# Allegro board DAQ_CARD_2V0.brd
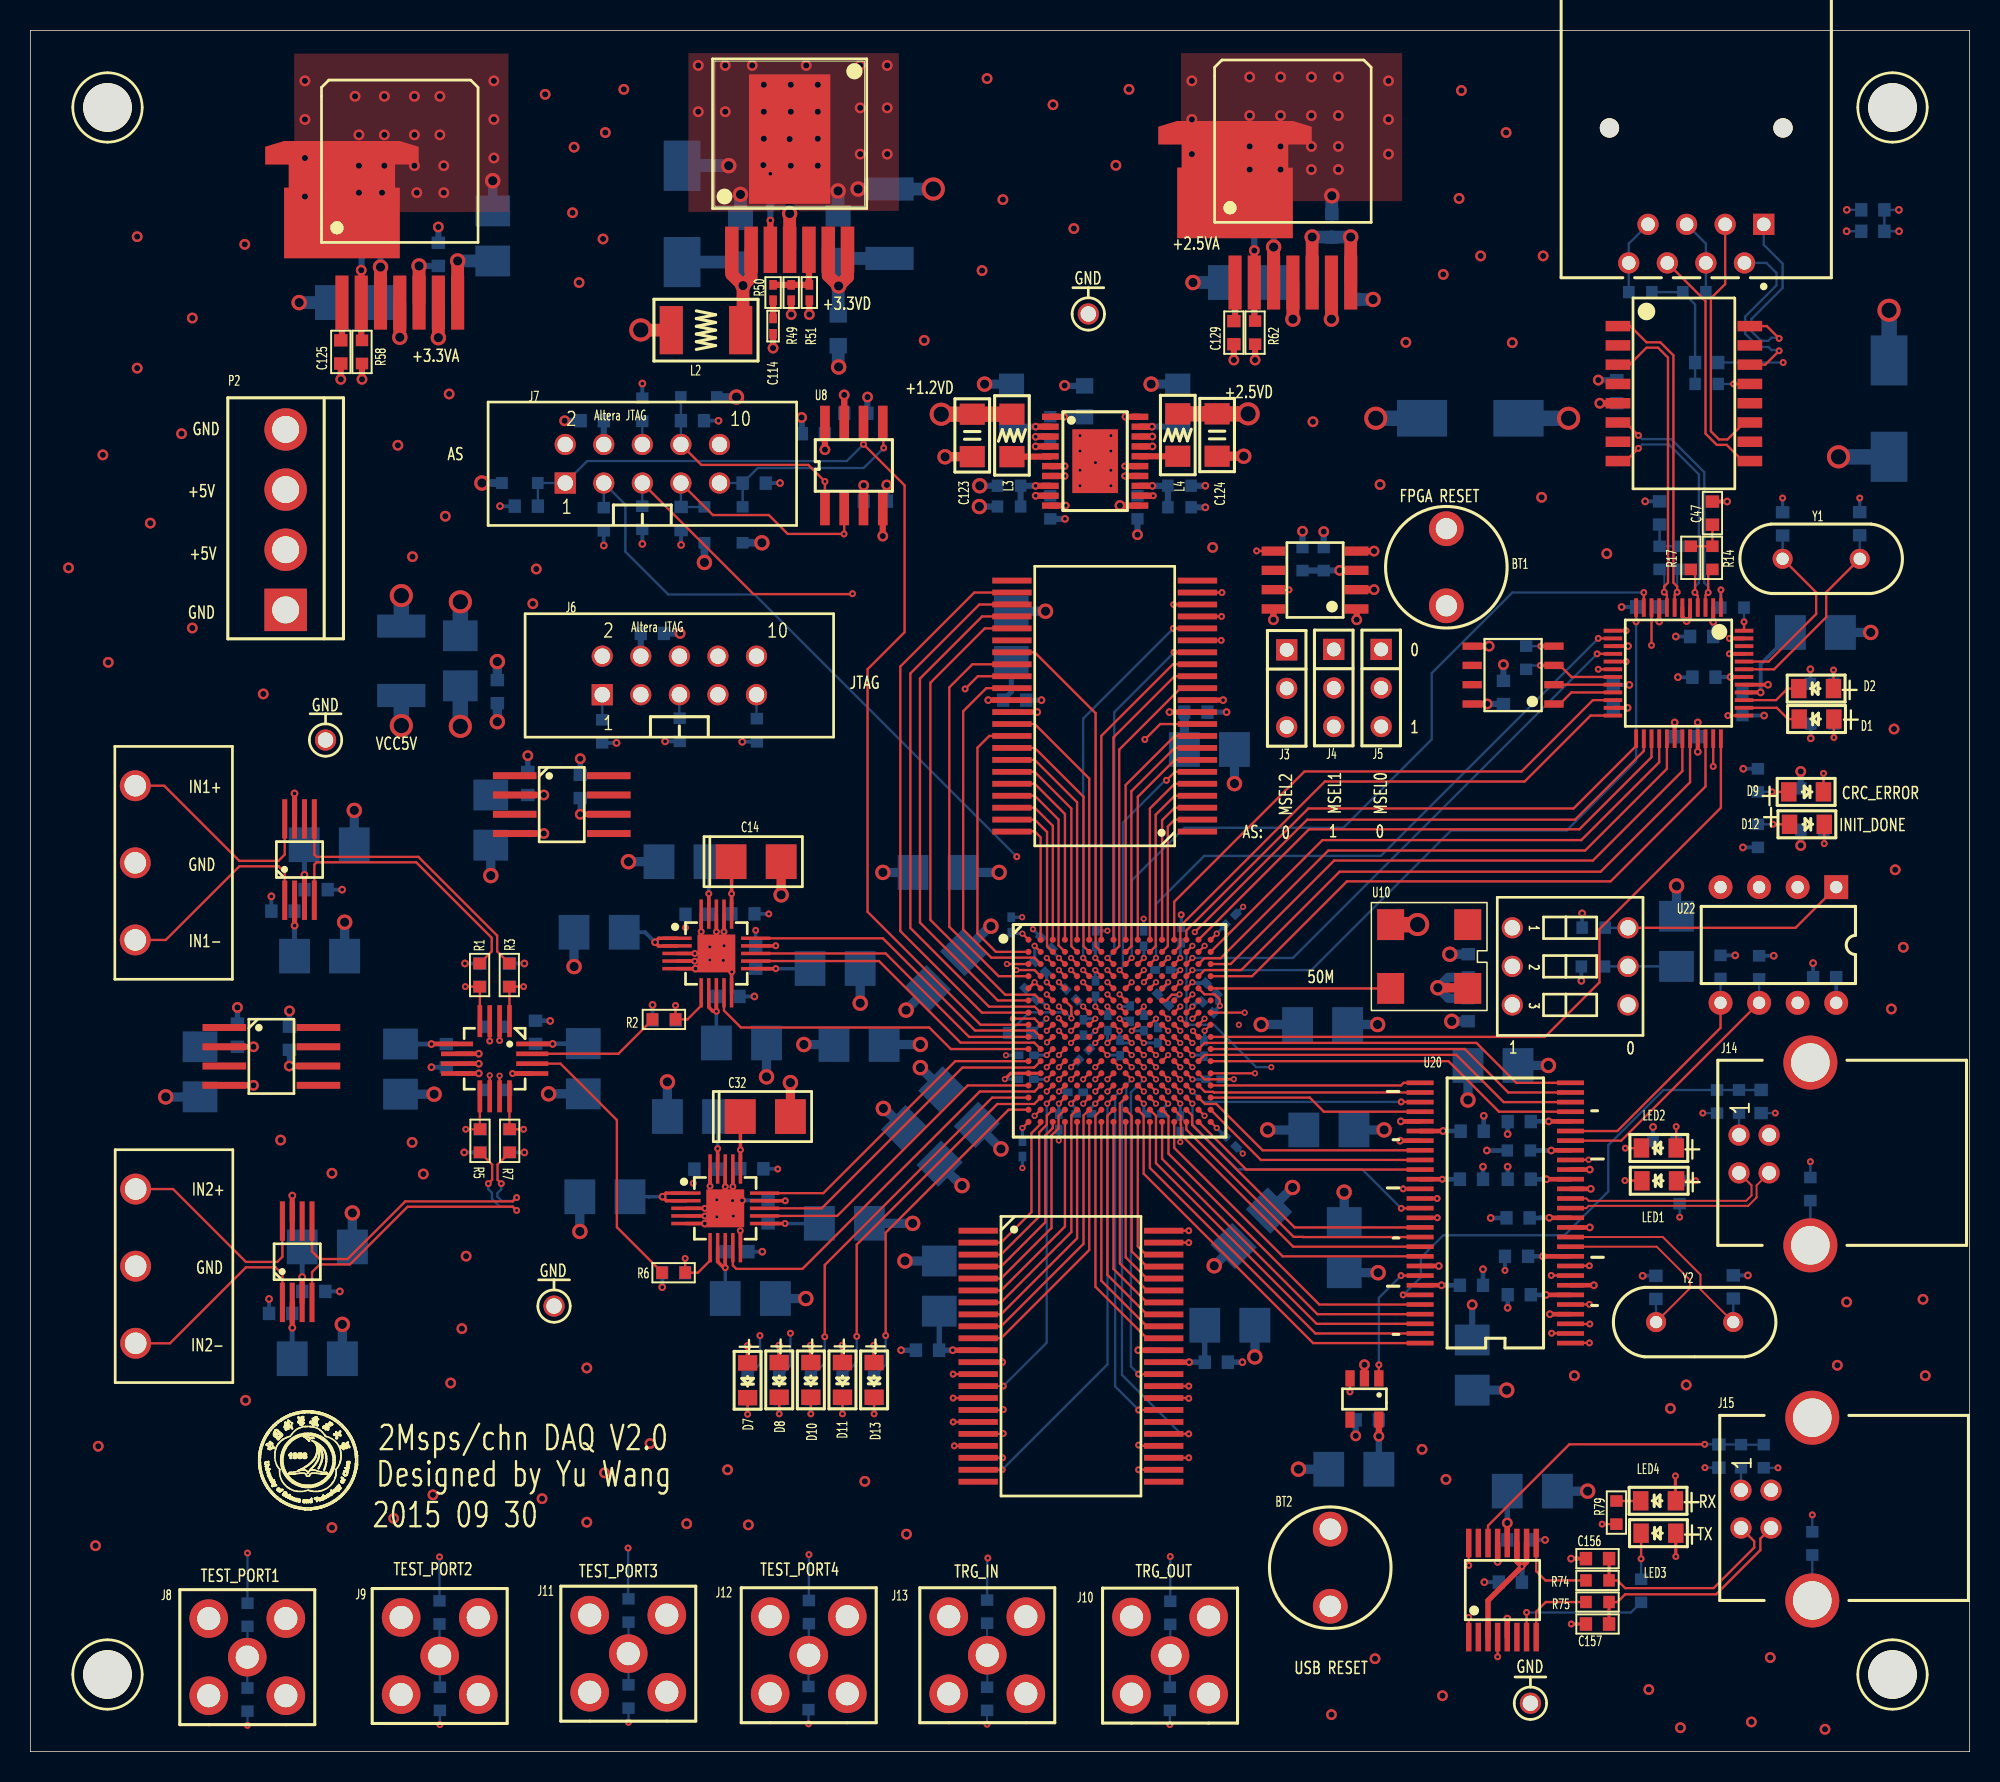
[diagram p0: board, top side]
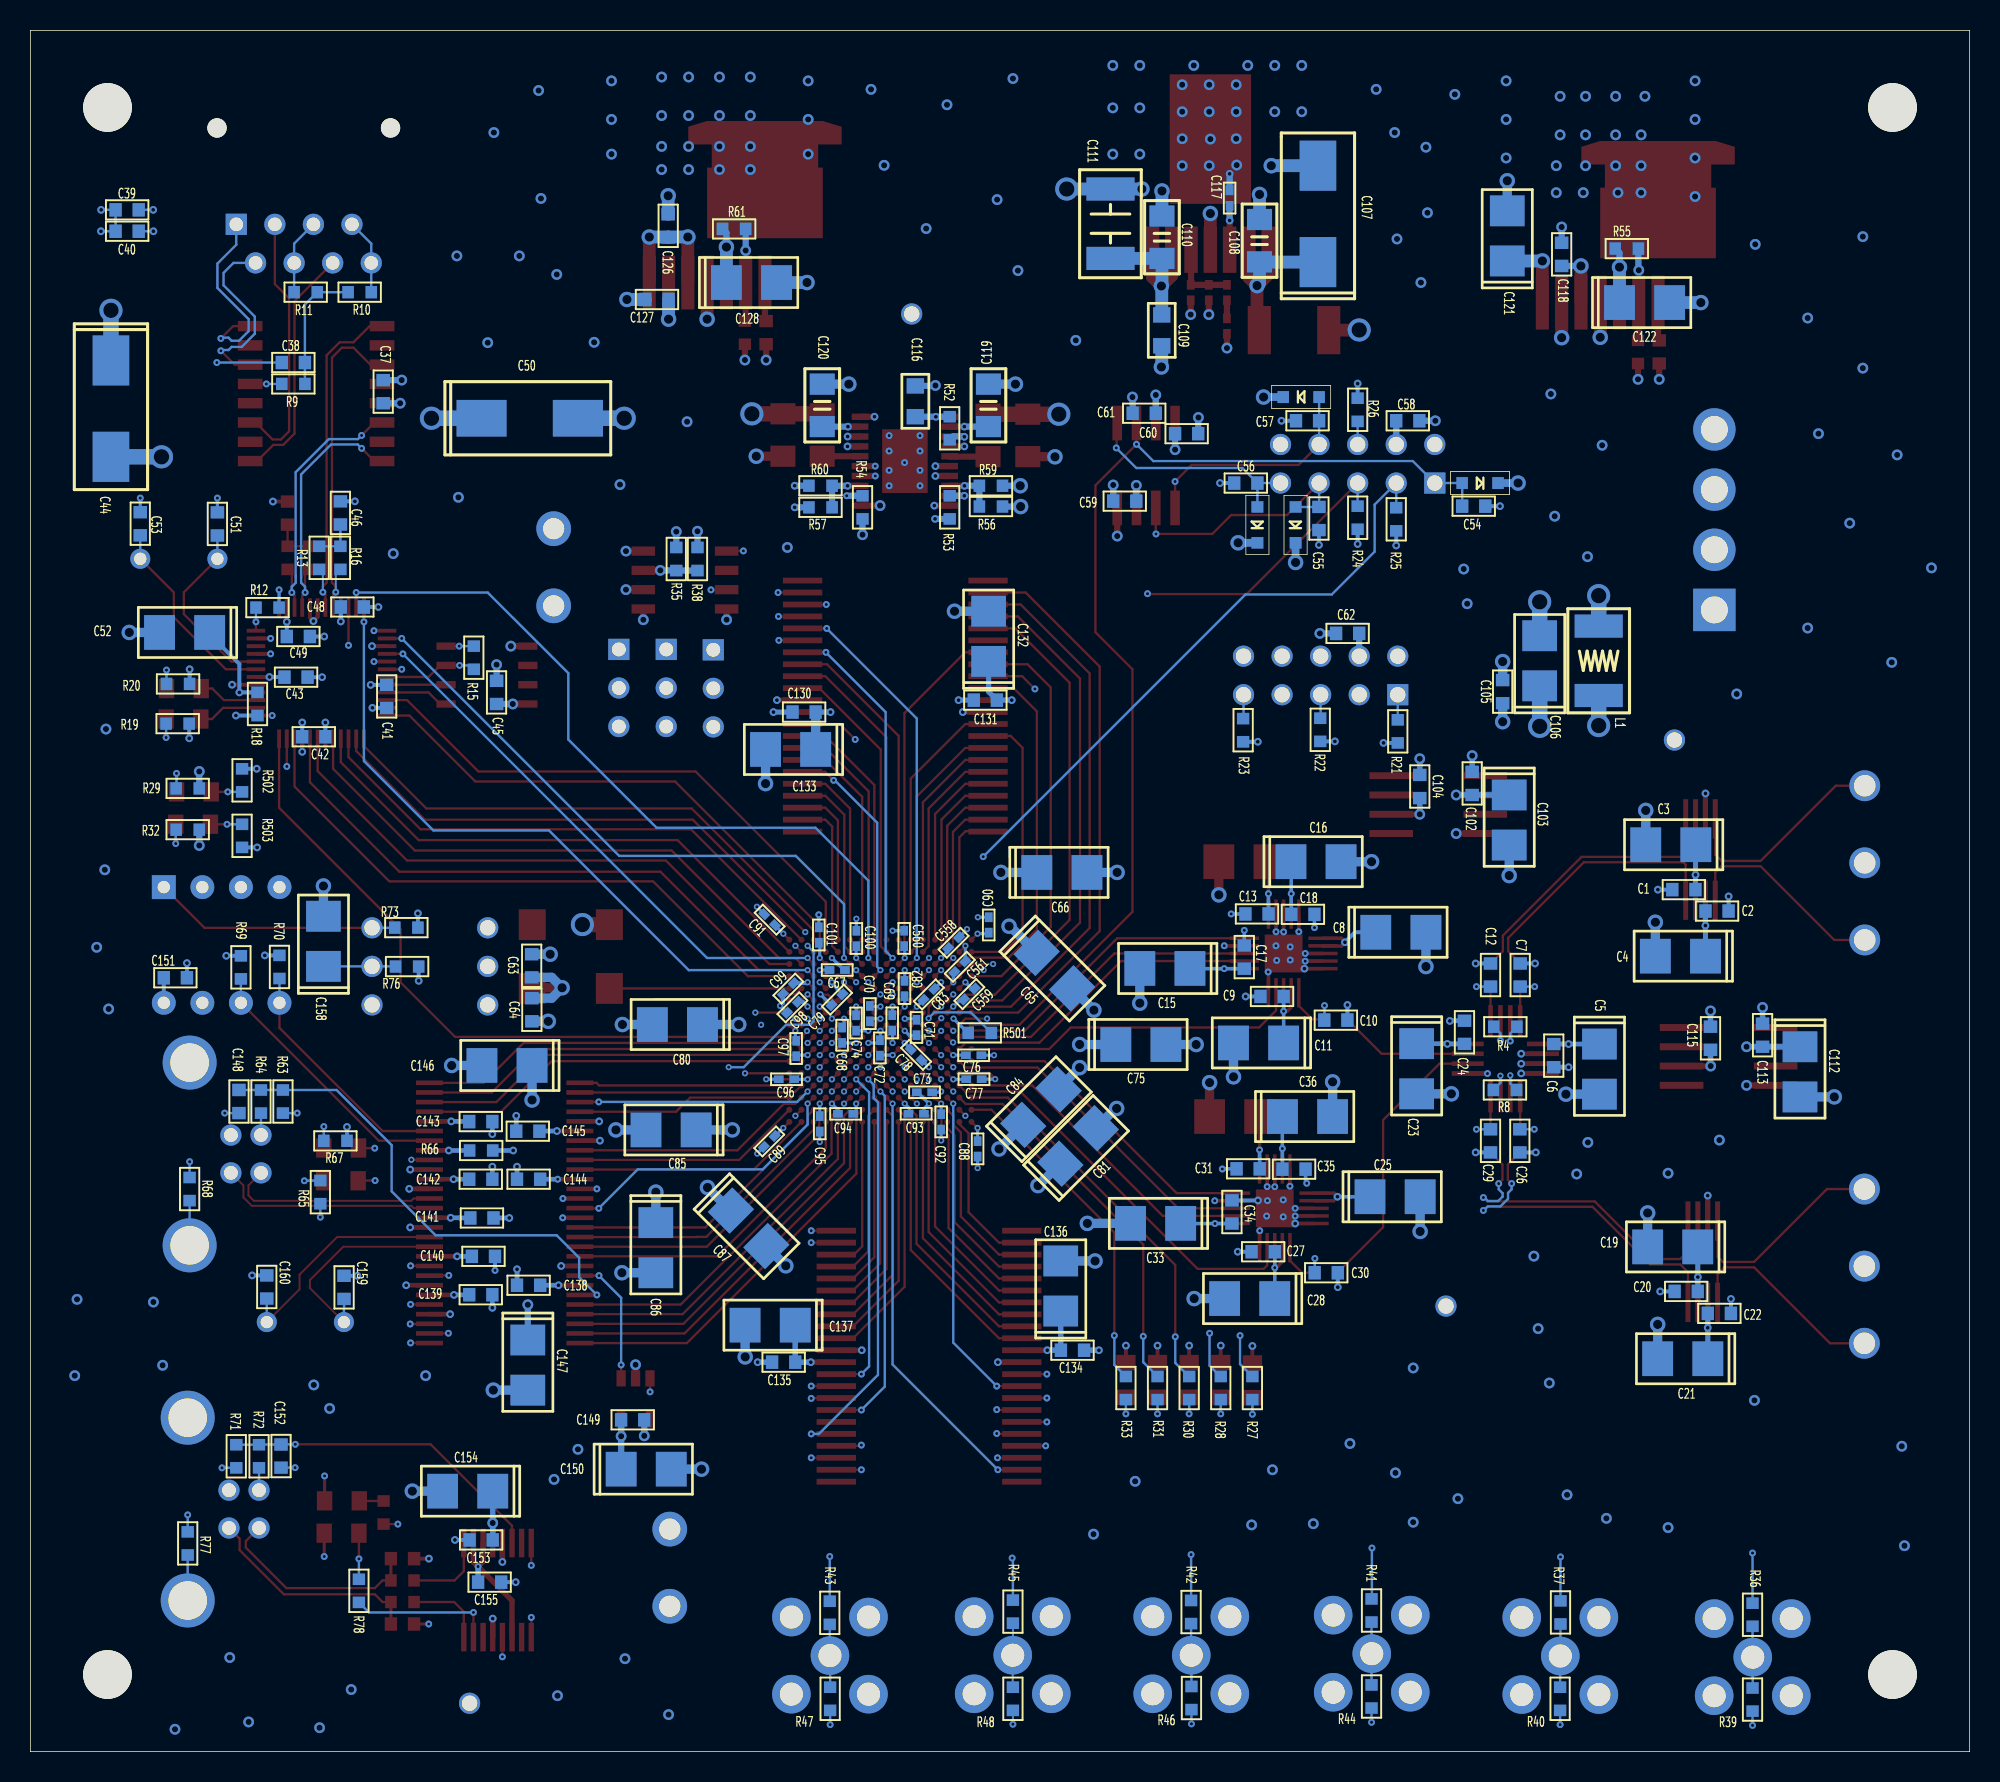
[diagram p1: board, bottom side, seen from below]

Outline 127.74 x 113.39 mm; copper layers: TOP, GND1, SIG1, POWER1, POWER2, SIG2, GND2, BOTTOM. Coordinates in mm from the lower left corner of the outline.
Outline path: 0,113.39 0,0 127.74,0 127.74,113.39 0,113.39

## Design rules (mm)
net group DIFF_SEC_IN1: nets N16777290 N16777300
net group DIFF_SEC_IN2: nets N16782189 N16782191
net group DIFFIN1: nets IN1+ IN1-
net group DIFFIN2: nets IN2+ IN2-
net group DIFFOUT1: nets N16778933 N16778934
net group DIFFOUT2: nets N16782312 N16782314
net group RX: nets RX+ RX-
net group RX2: nets N16772544 N16772560
net group TX: nets TX+ TX-
net group TX2: nets N16772564 N16772568
net group USB_DATA: nets N02792 N02796
net group USB_UART: nets N16767643 N16767647

## Placement (name value [footprint] x y rotation side)
BT1  Button  [INDC2-200-M]  93.27 78.02 90 top
BT2  Button  [INDC2-200-M]  85.62 12.12 270 top
C1  0.1uF  [SC0603]  18.82 56.78 0 bottom
C2  0.1uF  [SC0603]  16.64 55.37 180 bottom
C3  10uF  [STC3528]  19.68 59.74 0 bottom
C4  10uF  [STC3528]  19.05 52.4 0 bottom
C5  10uF  [STC3528]  24.38 44.96 270 bottom
C6  0.1uF  [SC0603]  27.39 45.85 270 bottom
C7  2.2n  [SC0603]  29.6 51.16 270 bottom
C8  10uF  [STC3528]  37.46 53.98 180 bottom
C9  0.1uF  [SC0603]  45.95 49.75 0 bottom
C10  0.1uF  [SC0603]  41.74 48.18 180 bottom
C11  10uF  [STC3528]  46.84 46.69 0 bottom
C12  2.2n  [SC0603]  31.56 51.16 90 bottom
C13  0.1uF  [SC0603]  46.94 55.18 0 bottom
C14  10uF  [STC3528]  47.8 58.62 0 top
C15  10uF  [STC3528]  53.01 51.59 0 bottom
C16  10uF  [STC3528]  43.05 58.62 180 bottom
C17  0.1uF  [SC0603]  47.78 52.34 90 bottom
C18  0.1uF  [SC0603]  43.92 55.16 180 bottom
C19  10uF  [STC3528]  19.56 33.25 0 bottom
C20  0.1uF  [SC0603]  18.67 30.31 0 bottom
C21  10uF  [STC3528]  18.9 25.88 0 bottom
C22  0.1uF  [SC0603]  16.48 28.87 180 bottom
C23  10uF  [STC3528]  36.42 44.98 270 bottom
C24  0.1uF  [SC0603]  33.27 47.38 90 bottom
C25  10uF  [STC3528]  37.85 36.55 180 bottom
C26  2.2n  [SC0603]  29.63 40.23 90 bottom
C27  0.1uF  [SC0603]  46.53 32.93 0 bottom
C28  10uF  [STC3528]  47.42 29.85 0 bottom
C29  2.2n  [SC0603]  31.56 40.23 270 bottom
C30  0.1uF  [SC0603]  42.38 31.55 180 bottom
C31  0.1uF  [SC0603]  47.52 38.39 0 bottom
C32  10uF  [STC3528]  48.41 41.83 0 top
C33  10uF  [STC3528]  53.62 34.8 0 bottom
C34  0.1uF  [SC0603]  48.59 35.55 90 bottom
C35  0.1uF  [SC0603]  44.5 38.37 180 bottom
C36  10uF  [STC3528]  43.61 41.83 180 bottom
C37  0.1uF  [SC0603]  104.5 89.59 90 bottom
C38  0.01uF 2KV  [SC0603]  110.41 91.5 0 bottom
C39  0.1uF  [SC0603]  121.36 101.56 180 bottom
C40  0.1uF  [SC0603]  121.36 100.15 180 bottom
C41  0.1uF  [SC0603]  104.27 69.51 90 bottom
C42  0.1uF  [SC0603]  109.07 66.85 0 bottom
C43  0.1uF  [SC0603]  110.24 70.78 180 bottom
C44  220uF  [STC7343]  122.43 88.47 270 bottom
C45  0.1uF  [SC0603]  97.03 69.77 90 bottom
C46  0.1uF  [SC0603]  107.31 81.6 90 bottom
C47  0.1uF  [SC0603]  110.79 81.58 90 top
C48  0.1uF  [SC0603]  106.53 75.4 180 bottom
C49  0.1uF  [SC0603]  110.08 73.46 180 bottom
C50  220uF  [STC7343]  94.84 87.83 180 bottom
C51  22pF  [SC0603]  115.42 80.87 90 bottom
C52  10uF  [STC3528]  117.58 73.72 0 bottom
C53  22pF  [SC0603]  120.5 80.89 90 bottom
C54  10pF  [SC0603]  32.66 82.04 180 bottom
C55  10pF  [SC0603]  42.86 81.23 270 bottom
C56  10pF  [SC0603]  47.68 83.57 0 bottom
C57  10pF  [SC0603]  43.61 87.67 0 bottom
C58  0.1uF  [SC0603]  37.01 87.67 180 bottom
C59  0.1uF  [SC0603]  55.65 82.37 0 bottom
C60  0.1uF  [SC0603]  51.57 86.82 180 bottom
C61  0.1uF  [SC0603]  54.37 88.16 0 bottom
C62  0.1uF  [SC0603]  40.97 73.66 0 bottom
C63  0.1u  [SC0603]  94.72 51.77 90 bottom
C64  0.01u  [SC0603]  94.7 48.87 270 bottom
C65  10uF  [STC3528]  60.28 51.45 225 bottom
C66  10uF  [STC3528]  59.79 57.92 180 bottom
C67  0.1uF  [SC0402]  74.59 51.49 180 bottom
C68  0.1uF  [SC0402]  74.27 47.19 270 bottom
C69  0.1uF  [SC0402]  70.97 48.01 270 bottom
C70  0.1uF  [SC0402]  72.44 48.62 270 bottom
C71  0.1uF  [SC0402]  69.37 47.7 270 bottom
C72  0.1uF  [SC0402]  71.78 46.36 90 bottom
C73  0.1uF  [SC0402]  68.84 43.43 0 bottom
C74  0.1uF  [SC0402]  73.35 48 270 bottom
C75  10uF  [STC3528]  54.59 46.58 180 bottom
C76  0.1uF  [SC0402]  65.6 45.87 180 bottom
C77  0.1uF  [SC0402]  65.58 44.3 180 bottom
C78  0.1uF  [SC0402]  69.39 45.9 45 bottom
C79  0.1uF  [SC0402]  74.6 49.54 135 bottom
C80  10uF  [STC3528]  85.12 47.9 0 bottom
C81  10uF  [STC3528]  58.72 39.9 135 bottom
C82  0.1uF  [SC0402]  70.16 50.27 90 bottom
C83  0.1uF  [SC0402]  68.55 49.88 135 bottom
C84  10uF  [STC3528]  61.17 42.46 135 bottom
C85  10uF  [STC3528]  85.53 40.95 0 bottom
C86  10uF  [STC3528]  86.54 33.2 270 bottom
C87  10uF  [STC3528]  80.42 34.47 225 bottom
C88  0.1uF  [SC0402]  65.34 39.71 270 bottom
C89  0.1uF  [SC0402]  79.07 40.2 315 bottom
C90  0.1uF  [SC0402]  64.61 54.46 90 bottom
C91  0.1uF  [SC0402]  79.04 54.81 45 bottom
C92  0.1uF  [SC0402]  67.74 41.48 270 bottom
C93  0.1uF  [SC0402]  69.39 42.02 180 bottom
C94  0.1uF  [SC0402]  74.04 42.01 0 bottom
C95  0.1uF  [SC0402]  75.74 41.36 270 bottom
C96  0.1uF  [SC0402]  77.93 44.29 0 bottom
C97  0.1uF  [SC0402]  77.29 46.32 90 bottom
C98  0.1uF  [SC0402]  77.54 49.03 315 bottom
C99  0.1uF  [SC0402]  77.81 50.26 315 bottom
C100  0.1uF  [SC0402]  73.33 53.56 90 bottom
C101  0.1uF  [SC0402]  75.8 53.79 90 bottom
C102  0.1uF  [SC0603]  32.77 63.78 90 bottom
C103  10uF  [STC3528]  30.33 61.37 270 bottom
C104  0.1uF  [SC0603]  36.22 63.58 90 bottom
C105  0.1uF  [SC0603]  30.76 69.82 90 bottom
C106  10uF  [STC3528]  28.32 71.86 90 bottom
C107  220uF  [STC7343]  42.93 101.3 90 bottom
C108  22uF  [SC1206]  46.77 99.53 90 bottom
C109  4.7uF  [SC0805]  53.21 93.62 270 bottom
C110  22uF  [SC1206]  53.2 99.76 90 bottom
C111  100uF  [SC1812]  56.59 100.65 90 bottom
C112  10uF  [STC3528]  11.18 44.78 270 bottom
C113  0.1uF  [SC0603]  13.64 47.19 90 bottom
C114  100p  [SC0402]  48.92 93.9 270 top
C115  0.1uF  [SC0603]  17.07 46.99 90 bottom
C116  0.47uF  [SC0805]  69.44 88.95 90 bottom
C117  0.01uF  [SC0402]  48.74 102.34 90 bottom
C118  1uF  [SC0603]  26.87 98.63 90 bottom
C119  15uF  [SC1206]  64.63 88.68 90 bottom
C120  15uF  [SC1206]  75.58 88.68 90 bottom
C121  10uF  [STC3528]  30.45 99.85 90 bottom
C122  10uF  [STC3528]  21.41 95.45 180 bottom
C123  33uF  [SC1206]  62.04 86.7 270 top
C124  22uF  [SC1206]  78.17 86.73 270 top
C125  470p  [SC0603]  20.45 92.2 270 top
C126  1uF  [SC0603]  85.73 100.51 90 bottom
C127  1uF  [SC0603]  86.46 95.66 0 bottom
C128  10uF  [STC3528]  80.24 96.77 180 bottom
C129  470p  [SC0603]  79.27 93.47 270 top
C130  0.1uF  [SC0603]  76.77 68.48 0 bottom
C131  0.1uF  [SC0603]  64.83 69.27 0 bottom
C132  10uF  [STC3528]  64.62 73.47 90 bottom
C133  10uF  [STC3528]  77.66 66.01 0 bottom
C134  0.1uF  [SC0603]  59.09 26.44 180 bottom
C135  0.1uF  [SC0603]  78.12 25.65 0 bottom
C136  10uF  [STC3528]  59.87 30.67 90 bottom
C137  10uF  [STC3528]  79.01 28.09 0 bottom
C138  0.1uF  [SC0603]  94.92 30.72 0 bottom
C139  0.1uF  [SC0603]  98.07 30.1 180 bottom
C140  0.1uF  [SC0603]  97.89 32.63 180 bottom
C141  0.1uF  [SC0603]  97.99 35.15 180 bottom
C142  0.1uF  [SC0603]  98.07 37.71 180 bottom
C143  0.1uF  [SC0603]  98.07 41.5 180 bottom
C144  0.1uF  [SC0603]  94.92 37.71 0 bottom
C145  0.1uF  [SC0603]  94.97 40.87 0 bottom
C146  10uF  [STC3528]  96.34 45.2 0 bottom
C147  10uF  [STC3528]  94.97 25.46 270 bottom
C148  0.1uF  [SC0603]  114 42.82 90 bottom
C149  0.1uF  [SC0603]  88.06 21.86 180 bottom
C150  10uF  [STC3528]  87.17 18.61 180 bottom
C151  0.1uF  [SC0603]  118.19 50.98 0 bottom
C152  0.1uF  [SC0603]  111.23 19.47 90 bottom
C153  0.1uF  [SC0603]  98.04 13.94 0 bottom
C154  10uF  [STC3528]  98.93 17.16 0 bottom
C155  0.1uF  [SC0603]  97.49 11.16 0 bottom
C156  47pF  [SC0603]  103.23 12.71 180 top
C157  47pF  [SC0603]  103.23 8.41 180 top
C158  2.2uF  [STC3528]  108.43 53.38 90 bottom
C159  12pF  [SC0603]  107.07 30.58 270 bottom
C160  12pF  [SC0603]  112.17 30.61 270 bottom
C558  0.1uF  [SC0402]  66.92 53.28 135 bottom
C559  0.1uF  [SC0402]  65.89 49.91 135 bottom
C560  0.1uF  [SC0402]  70.18 53.57 90 bottom
C561  0.1uF  [SC0402]  66.51 51.7 135 bottom
D1  SPEED  [SD0805]  117.65 68.02 180 top
D2  LINK/ACT  [SD0805]  117.63 70.03 180 top
D3  BAT54HT1G  [MY_SOD323]  31.06 83.57 0 bottom
D4  BAT54HT1G  [MY_SOD323]  44.4 79.63 90 bottom
D5  BAT54HT1G  [MY_SOD323]  46.91 79.63 90 bottom
D6  BAT54HT1G  [MY_SOD323]  45.21 89.23 180 bottom
D7  LED  [SD0805]  47.24 24.46 270 top
D8  LED  [SD0805]  49.33 24.49 270 top
D9  LED  [SD0805]  116.97 63.22 0 top
D10  LED  [SD0805]  51.41 24.49 270 top
D11  LED  [SD0805]  53.49 24.49 270 top
D12  LED  [SD0805]  117.02 61.09 0 top
D13  LED  [SD0805]  55.58 24.49 270 top
J1  -  [CON3]  5.56 50.88 0 top
J2  -  [CON3]  5.59 24.31 0 top
J3  MSEL2  [SIP-3P]  82.75 70.04 270 top
J4  MSEL1  [SIP-3P]  85.85 70.07 270 top
J5  MSEL0  [SIP-3P]  88.98 70.07 270 top
J6  JTAG Header  [HEAD_10P_GAP]  42.75 70.89 0 top
J7  AS Header  [HEAD_10P_GAP]  40.31 84.84 0 top
J8  SMA  [CON-BNC-S-T]  14.29 6.22 90 top
J9  SMA  [CON-BNC-S-T]  26.96 6.3 90 top
J10  SMA  [CON-BNC-S-T]  75.07 6.32 90 top
J11  SMA  [CON-BNC-S-T]  39.38 6.45 90 top
J12  SMA  [CON-BNC-S-T]  51.27 6.35 90 top
J13  SMA  [CON-BNC-S-T]  63.03 6.35 90 top
J14  USB_B  [MJ4-SR-1]  112.55 40.61 90 top
J15  USB_B  [MJ4-SR-1]  112.67 17.22 90 top
L1  10uH  [SL1812]  24.43 71.86 270 bottom
L2  10uH  [SL1812]  44.5 93.64 0 top
L3  1uH  [SL1206]  64.66 86.7 270 top
L4  1.5uH  [SL1206]  75.58 86.73 90 top
LED1  Green  [SD0805]  107.29 37.6 180 top
LED2  Yellow  [SD0805]  107.26 39.76 180 top
LED3  Green  [SD0805]  107.24 14.39 180 top
LED4  Yellow  [SD0805]  107.21 16.52 180 top
NOREF  -  [unnamed]  5.08 108.31 0 top
NOREF#2  -  [#2]  17.86 18.42 0 top
NOREF#3  -  [#2]  33.43 -44.86 0 top
NOREF#4  -  [#2]  0 0 0 top
NOREF#5  -  [#2]  0 0 90 top
NOREF#6  -  [unnamed]  5.08 5.08 0 top
NOREF#7  -  [unnamed]  122.66 5.08 0 top
NOREF#8  -  [unnamed]  122.66 108.31 0 top
P1  RJ45  [RJ_RA-8]  114.17 100.61 180 top
P2  Pin 4  [SIP-4P-156]  16.81 81.15 90 top
R1  100  [SR0603]  29.59 51.16 270 top
R2  100  [SR0603]  41.73 48.23 0 top
R3  100  [SR0603]  31.55 51.16 270 top
R4  21k  [SR0603]  30.58 47.75 0 bottom
R5  100  [SR0603]  29.62 40.23 90 top
R6  100  [SR0603]  42.37 31.55 0 top
R7  100  [SR0603]  31.57 40.23 90 top
R8  21k  [SR0603]  30.61 43.59 180 bottom
R9  75 1%  [SR0603]  110.41 90.09 180 bottom
R10  75 1%  [SR0603]  106.05 96.14 0 bottom
R11  75 1%  [SR0603]  109.6 96.14 180 bottom
R12  6.8k 1%  [SR0603]  112.12 75.36 0 bottom
R13  50 1%  [SR0603]  108.71 78.64 90 bottom
R14  50 1%  [SR0603]  110.79 78.64 90 top
R15  10k  [SR0603]  98.53 72.06 90 bottom
R16  50 1%  [SR0603]  107.31 78.64 270 bottom
R17  50 1%  [SR0603]  109.37 78.64 270 top
R18  4.7k  [SR0603]  112.78 69.01 90 bottom
R19  510  [SR0603]  118.03 67.72 0 bottom
R20  510  [SR0603]  118.01 70.33 0 bottom
R21  1k  [SR0603]  37.67 67.21 90 bottom
R22  1k  [SR0603]  42.77 67.31 90 bottom
R23  1k  [SR0603]  47.85 67.28 90 bottom
R24  10k  [SR0603]  40.31 81.28 90 bottom
R25  10k  [SR0603]  37.77 81.18 90 bottom
R26  10k  [SR0603]  40.31 88.39 90 bottom
R27  270  [SR0603]  47.24 23.95 270 bottom
R28  270  [SR0603]  49.33 23.95 270 bottom
R29  270  [SR0603]  117.37 63.45 0 bottom
R30  270  [SR0603]  51.41 23.95 270 bottom
R31  270  [SR0603]  53.49 23.95 270 bottom
R32  270  [SR0603]  117.37 60.73 0 bottom
R33  270  [SR0603]  55.58 23.95 270 bottom
R35  470k  [SR0603]  85.19 78.56 270 bottom
R36  0  [SR0603]  14.3 9.02 90 bottom
R37  0  [SR0603]  26.95 9.17 90 bottom
R38  620k  [SR0603]  83.79 78.56 90 bottom
R39  50  [SR0603]  14.3 3.43 270 bottom
R40  50  [SR0603]  26.97 3.48 270 bottom
R41  0  [SR0603]  39.4 9.3 90 bottom
R42  0  [SR0603]  51.28 9.19 90 bottom
R43  0  [SR0603]  75.08 9.14 90 bottom
R44  50  [SR0603]  39.4 3.63 270 bottom
R45  0  [SR0603]  63.02 9.22 90 bottom
R46  50  [SR0603]  51.26 3.53 270 bottom
R47  50  [SR0603]  75.06 3.48 270 bottom
R48  50  [SR0603]  63.02 3.48 270 bottom
R49  75k  [SR0402]  50.11 96.11 270 top
R50  1k  [SR0402]  48.92 96.11 270 top
R51  23.7k  [SR0402]  51.31 96.11 90 top
R52  4.99 1%  [SR0603]  67.18 87.17 90 bottom
R53  49.9k 1%  [SR0603]  67.18 81.97 270 bottom
R54  49.9k 1%  [SR0603]  72.92 81.97 90 bottom
R55  3.57k  [SR0603]  22.58 99.01 180 bottom
R56  4.99k 1%  [SR0603]  64.47 82.02 0 bottom
R57  21.5k 1%  [SR0603]  75.69 81.97 0 bottom
R58  1.15k  [SR0603]  21.84 92.2 270 top
R59  10k 1%  [SR0603]  64.47 83.39 180 bottom
R60  10k 1%  [SR0603]  75.69 83.39 0 bottom
R61  3.57k  [SR0603]  81.38 100.3 180 bottom
R62  1.69k  [SR0603]  80.67 93.47 270 top
R63  60k  [SR0603]  111.1 42.82 90 bottom
R64  30k  [SR0603]  112.55 42.82 90 bottom
R65  270  [SR0603]  108.64 36.86 270 bottom
R66  10k  [SR0603]  98.04 39.6 0 bottom
R67  270  [SR0603]  107.65 40.23 180 bottom
R68  1M  [SR0603]  117.25 37.06 90 bottom
R69  2.2k  [SR0603]  113.87 51.66 90 bottom
R70  2.2k  [SR0603]  111.33 51.69 90 bottom
R71  60k  [SR0603]  114.17 19.46 90 bottom
R72  30k  [SR0603]  112.67 19.46 270 bottom
R73  10k  [SR0603]  102.97 54.28 180 bottom
R74  27  [SR0603]  103.23 11.28 0 top
R75  27  [SR0603]  103.23 9.86 0 top
R76  100k  [SR0603]  102.92 51.71 180 bottom
R77  1M  [SR0603]  117.37 13.72 90 bottom
R78  270  [SR0603]  106.1 10.59 90 bottom
R79  270  [SR0603]  104.47 15.75 90 top
R501  10k  [SR0603]  65.2 47.35 180 bottom
R502  10k  [SR0603]  113.79 63.98 270 bottom
R503  10k  [SR0603]  113.79 60.33 90 bottom
SW1  SW DIP3  [SWITCH-3P-DIP]  96.62 56.27 270 top
T1  -  [PH163539A]  105.49 83.11 0 top
TP1  Point_test  [TP_40MIL]  19.44 66.64 0 top
TP2  Point_test  [TP_40MIL]  34.49 29.35 0 top
TP3  Point_test  [TP_40MIL]  69.68 94.7 0 top
TP4  Point_test  [TP_40MIL]  98.81 3.19 0 top
U1  AD7985_QFN  [AD7985]  43.15 50.55 0 top
U2  AD8476MSOP  [AD8476_MSOP]  19.25 56.31 90 top
U3  AD8426_LFCSP  [AD8426]  28.58 47.65 270 top
U4  AD7985_QFN  [AD7985]  43.74 33.76 0 top
U5  AD8476MSOP  [AD8476_MSOP]  19.1 29.82 90 top
U6  DM9000A  [DM9000A_LQFP48]  112.06 74.55 180 top
U7  93LC46-SN  [93LC46]  99.62 73.37 180 top
U8  EPCS4  [SOP8-50-160]  54.24 84.72 0 top
U9  TPS3307-25  [TPS3307-SOIC]  86.58 79.64 180 top
U10  50MHz  [OSC4-0705]  92.14 52.37 180 top
U11  EP4CE10U256  [EP4CE10_UBGA_0_4MM]  64.74 40.48 0 top
U12  ADR444  [ADR44X_SOIC_N]  31.99 59.93 0 top
U13  LMZ10503  [LMZ10503-ADJ]  44.93 101.65 0 top
U14  ADR440  [ADR44X_SOIC_N]  12.87 43.35 0 top
U15  LM26420X-TSSOP  [LM26420-TSSOP]  67.93 81.75 0 top
U16  -  [TPS74201-KTW]  19.28 99.52 0 top
U17  -  [TPS74201-KTW]  78.11 100.84 0 top
U18  IS61WV3216DBLL  [IS61WV3216DBLL_TSOP]  76.64 78.08 180 top
U19  IS61WV3216DBLL  [IS61WV3216DBLL_TSOP]  62.66 16.84 0 top
U20  CY7C68013A  [SOP56-25-300]  96.49 35.48 90 top
U21  TPS3820-33  [TPS3820-33-SOT23]  89.32 24.03 180 top
U22  24LC64  [DIP8-100-300]  115.14 53.14 180 top
U23  -  [FT230XS]  99.42 8.69 90 top
Y1  25MHz  [XTAL2-200A]  117.96 78.57 180 top
Y2  24MHz  [XTAL2-200A]  109.62 28.3 180 top

## Library data of the parts
BT1 BT2 = Button
C1 C2 C6 C9 C13 C17 C18 C20 C22 C24 C27 C31 C34 C35 C67-C74 C76-C79 C82 C83 C88-C102 C104 C105 C113-C117 C125 C129 C138-C145 C149 C151-C153 C155-C157 C159 C160 C558-C561 = Capacitor np
C3-C5 C11 C14-C16 C19 C21 C23 C28 C32 C33 C36 C65 C66 C75 C80 C81 C84-C87 C103 C106-C112 C123 C124 C150 C154 = Capacitor pol
C7 C8 C10 C12 C25 C26 C29 C30 C37-C43 C45-C49 C51 C53-C64 C130 C131 C134 C135 C148 = CAP NP
C44 C50 C52 C132 C133 C136 C137 C146 C147 C158 = CAP POL
C118-C122 C126-C128 = Capacitor
D1 D2 D7-D13 = LED
D3-D6 = DIODE_0
J1-J5 = CON3
J6 = JTAG_0
J7 = AS Header
J8-J13 = LEMO
J14 J15 = USB_B
L1-L4 = Inductor
LED1-LED4 = Diode-Light-emitt
P1 = RJ45_0
P2 = Pin 4
R1-R33 R36 R37 R39-R48 R501-R503 = R
R35 R38 R49-R62 R69 R70 R74 R75 = Resistor
R63-R68 R71-R73 R76-R79 = RESISTOR
SW1 = SW DIP3
T1 = PH163539A_1
TP1-TP4 = Point_test
U1 U4 = AD7985_QFN
U2 U5 = AD8476MSOP
U3 = AD8426_LFCSP
U6 = DM9000A_1
U7 = 93C46B_0
U8 = EPCS1
U9 = TPS3307-25
U10 = Oscillator_1
U11 = EP4CE10U256
U12 = ADR444
U13 = LMZ10503
U14 = ADR440_2
U15 = LM26420-TSSOP
U16 U17 = TPS742xx-KTW
U18 U19 = IS61WV3216DBLL
U20 = CY7C68013A
U21 = TPS3820-33
U22 = 24LC64
U23 = FT230XS
Y1 = XM/SM
Y2 = Crystal

## Footprints (pads in the part's own frame, mm; a bottom-side part is the same pattern mirrored in y, then rotated)
93LC46
  rect 1.27x0.483 smd: 1(-0.737,4.356) 2(-0.737,3.086) 3(-0.737,1.816) 4(-0.737,0.546) 5(4.648,0.546) 6(4.648,1.816) 7(4.648,3.086) 8(4.648,4.356)
AD7985
  rect 1.93x0.229 smd: 1(-0.559,3.033) 2(-0.559,2.532) 3(-0.559,2.032) 4(-0.559,1.532) 5(-0.559,1.031) 11(4.623,1.031) 12(4.623,1.532) 13(4.623,2.032) 14(4.623,2.532) 15(4.623,3.033)
  rect 0.229x1.93 smd: 6(1.031,-0.559) 7(1.532,-0.559) 8(2.032,-0.559) 9(2.532,-0.559) 10(3.033,-0.559) 16(3.033,4.623) 17(2.532,4.623) 18(2.032,4.623) 19(1.532,4.623) 20(1.031,4.623)
  rect 2.489x2.489 smd: 21(2.032,2.032)
AD8426
  rect 2.108x0.305 smd: 1(-0.47,2.982) 2(-0.47,2.332) 3(-0.47,1.681) 4(-0.47,1.031) 9(4.483,1.031) 10(4.483,1.681) 11(4.483,2.332) 12(4.483,2.982)
  rect 0.305x2.108 smd: 5(1.031,-0.47) 6(1.681,-0.47) 7(2.332,-0.47) 8(2.982,-0.47) 13(2.982,4.483) 14(2.332,4.483) 15(1.681,4.483) 16(1.031,4.483)
AD8476_MSOP
  rect 2.591x0.33 smd: 1(-0.229,2.499) 2(-0.229,1.849) 3(-0.229,1.199) 4(-0.229,0.549) 5(5.131,0.549) 6(5.131,1.199) 7(5.131,1.849) 8(5.131,2.499)
ADR44X_SOIC_N
  rect 2.87x0.457 smd: 1(-0.089,4.356) 2(-0.089,3.086) 3(-0.089,1.816) 4(-0.089,0.546) 5(6.109,0.546) 6(6.109,1.816) 7(6.109,3.086) 8(6.109,4.356)
CON3
  round 2.032 hole 1.422: 1(1.346,2.591) 2(1.346,7.671) 3(1.346,12.751)
CON-BNC-S-T
  round 2.54 hole 1.524: 1(0,0) 2(2.54,-2.54) 3(2.54,2.54) 4(-2.54,2.54) 5(-2.54,-2.54)
DIP8-100-300
  rect 1.575x1.575 hole 0.813: 1(-3.81,-3.81)
  round 1.575 hole 0.813: 2(-1.27,-3.81) 3(1.27,-3.81) 4(3.81,-3.81) 5(3.81,3.81) 6(1.27,3.81) 7(-1.27,3.81) 8(-3.81,3.81)
DM9000A_LQFP48
  rect 0.254x1.219 smd: 1(0.711,-0.813) 2(1.219,-0.813) 3(1.727,-0.813) 4(2.235,-0.813) 5(2.743,-0.813) 6(3.251,-0.813) 7(3.759,-0.813) 8(4.267,-0.813) 9(4.775,-0.813) 10(5.283,-0.813) 11(5.791,-0.813) 12(6.299,-0.813) 25(6.299,7.823) 26(5.791,7.823) 27(5.283,7.823) 28(4.775,7.823) 29(4.267,7.823) 30(3.759,7.823) 31(3.251,7.823) 32(2.743,7.823) 33(2.235,7.823) 34(1.727,7.823) 35(1.219,7.823) 36(0.711,7.823)
  rect 1.219x0.254 smd: 13(7.823,0.711) 14(7.823,1.219) 15(7.823,1.727) 16(7.823,2.235) 17(7.823,2.743) 18(7.823,3.251) 19(7.823,3.759) 20(7.823,4.267) 21(7.823,4.775) 22(7.823,5.283) 23(7.823,5.791) 24(7.823,6.299) 37(-0.813,6.299) 38(-0.813,5.791) 39(-0.813,5.283) 40(-0.813,4.775) 41(-0.813,4.267) 42(-0.813,3.759) 43(-0.813,3.251) 44(-0.813,2.743) 45(-0.813,2.235) 46(-0.813,1.727) 47(-0.813,1.219) 48(-0.813,0.711)
EP4CE10_UBGA_0_4MM
  round 0.399 smd: A1(1.001,13) A2(1.801,13) A3(2.601,13) A4(3.401,13) A5(4.201,13) A6(5.001,13) A7(5.799,13) A8(6.599,13) A9(7.399,13) A10(8.199,13) A11(8.999,13) A12(9.799,13) A13(10.599,13) A14(11.4,13) A15(12.2,13) A16(13,13) B1(1.001,12.2) B2(1.801,12.2) B3(2.601,12.2) B4(3.401,12.2) B5(4.201,12.2) B6(5.001,12.2) B7(5.799,12.2) B8(6.599,12.2) B9(7.399,12.2) B10(8.199,12.2) B11(8.999,12.2) B12(9.799,12.2) B13(10.599,12.2) B14(11.4,12.2) B15(12.2,12.2) B16(13,12.2) C1(1.001,11.4) C2(1.801,11.4) C3(2.601,11.4) C4(3.401,11.4) C5(4.201,11.4) C6(5.001,11.4) C7(5.799,11.4) C8(6.599,11.4) C9(7.399,11.4) C10(8.199,11.4) C11(8.999,11.4) C12(9.799,11.4) C13(10.599,11.4) C14(11.4,11.4) C15(12.2,11.4) C16(13,11.4) D1(1.001,10.599) D2(1.801,10.599) D3(2.601,10.599) D4(3.401,10.599) D5(4.201,10.599) D6(5.001,10.599) D7(5.799,10.599) D8(6.599,10.599) D9(7.399,10.599) D10(8.199,10.599) D11(8.999,10.599) D12(9.799,10.599) D13(10.599,10.599) D14(11.4,10.599) D15(12.2,10.599) D16(13,10.599) E1(1.001,9.799) E2(1.801,9.799) E3(2.601,9.799) E4(3.401,9.799) E5(4.201,9.799) E6(5.001,9.799) E7(5.799,9.799) E8(6.599,9.799) E9(7.399,9.799) E10(8.199,9.799) E11(8.999,9.799) E12(9.799,9.799) E13(10.599,9.799) E14(11.4,9.799) E15(12.2,9.799) E16(13,9.799) F1(1.001,8.999) F2(1.801,8.999) F3(2.601,8.999) F4(3.401,8.999) F5(4.201,8.999) F6(5.001,8.999) F7(5.799,8.999) F8(6.599,8.999) F9(7.399,8.999) F10(8.199,8.999) F11(8.999,8.999) F12(9.799,8.999) F13(10.599,8.999) F14(11.4,8.999) F15(12.2,8.999) F16(13,8.999) G1(1.001,8.199) G2(1.801,8.199) G3(2.601,8.199) G4(3.401,8.199) G5(4.201,8.199) G6(5.001,8.199) G7(5.799,8.199) G8(6.599,8.199) G9(7.399,8.199) G10(8.199,8.199) G11(8.999,8.199) G12(9.799,8.199) G13(10.599,8.199) G14(11.4,8.199) G15(12.2,8.199) G16(13,8.199) H1(1.001,7.399) H2(1.801,7.399) H3(2.601,7.399) H4(3.401,7.399) H5(4.201,7.399) H6(5.001,7.399) H7(5.799,7.399) H8(6.599,7.399) H9(7.399,7.399) H10(8.199,7.399) H11(8.999,7.399) H12(9.799,7.399) H13(10.599,7.399) H14(11.4,7.399) H15(12.2,7.399) H16(13,7.399) J1(1.001,6.599) J2(1.801,6.599) J3(2.601,6.599) J4(3.401,6.599) J5(4.201,6.599) J6(5.001,6.599) J7(5.799,6.599) J8(6.599,6.599) J9(7.399,6.599) J10(8.199,6.599) J11(8.999,6.599) J12(9.799,6.599) J13(10.599,6.599) J14(11.4,6.599) J15(12.2,6.599) J16(13,6.599) K1(1.001,5.799) K2(1.801,5.799) K3(2.601,5.799) K4(3.401,5.799) K5(4.201,5.799) K6(5.001,5.799) K7(5.799,5.799) K8(6.599,5.799) K9(7.399,5.799) K10(8.199,5.799) K11(8.999,5.799) K12(9.799,5.799) K13(10.599,5.799) K14(11.4,5.799) K15(12.2,5.799) K16(13,5.799) L1(1.001,5.001) L2(1.801,5.001) L3(2.601,5.001) L4(3.401,5.001) L5(4.201,5.001) L6(5.001,5.001) L7(5.799,5.001) L8(6.599,5.001) L9(7.399,5.001) L10(8.199,5.001) L11(8.999,5.001) L12(9.799,5.001) L13(10.599,5.001) L14(11.4,5.001) L15(12.2,5.001) L16(13,5.001) M1(1.001,4.201) M2(1.801,4.201) M3(2.601,4.201) M4(3.401,4.201) M5(4.201,4.201) M6(5.001,4.201) M7(5.799,4.201) M8(6.599,4.201) M9(7.399,4.201) M10(8.199,4.201) M11(8.999,4.201) M12(9.799,4.201) M13(10.599,4.201) M14(11.4,4.201) M15(12.2,4.201) M16(13,4.201) N1(1.001,3.401) N2(1.801,3.401) N3(2.601,3.401) N4(3.401,3.401) N5(4.201,3.401) N6(5.001,3.401) N7(5.799,3.401) N8(6.599,3.401) N9(7.399,3.401) N10(8.199,3.401) N11(8.999,3.401) N12(9.799,3.401) N13(10.599,3.401) N14(11.4,3.401) N15(12.2,3.401) N16(13,3.401) P1(1.001,2.601) P2(1.801,2.601) P3(2.601,2.601) P4(3.401,2.601) P5(4.201,2.601) P6(5.001,2.601) P7(5.799,2.601) P8(6.599,2.601) P9(7.399,2.601) P10(8.199,2.601) P11(8.999,2.601) P12(9.799,2.601) P13(10.599,2.601) P14(11.4,2.601) P15(12.2,2.601) P16(13,2.601) R1(1.001,1.801) R2(1.801,1.801) R3(2.601,1.801) R4(3.401,1.801) R5(4.201,1.801) R6(5.001,1.801) R7(5.799,1.801) R8(6.599,1.801) R9(7.399,1.801) R10(8.199,1.801) R11(8.999,1.801) R12(9.799,1.801) R13(10.599,1.801) R14(11.4,1.801) R15(12.2,1.801) R16(13,1.801) T1(1.001,1.001) T2(1.801,1.001) T3(2.601,1.001) T4(3.401,1.001) T5(4.201,1.001) T6(5.001,1.001) T7(5.799,1.001) T8(6.599,1.001) T9(7.399,1.001) T10(8.199,1.001) T11(8.999,1.001) T12(9.799,1.001) T13(10.599,1.001) T14(11.4,1.001) T15(12.2,1.001) T16(13,1.001)
FT230XS
  rect 1.88x0.356 smd: 1(-1.143,4.674) 2(-1.143,4.039) 3(-1.143,3.404) 4(-1.143,2.769) 5(-1.143,2.134) 6(-1.143,1.499) 7(-1.143,0.864) 8(-1.143,0.229) 9(5.055,0.229) 10(5.055,0.864) 11(5.055,1.499) 12(5.055,2.134) 13(5.055,2.769) 14(5.055,3.404) 15(5.055,4.039) 16(5.055,4.674)
HEAD_10P_GAP
  rect 1.397x1.397 hole 1.016: 1(-5.08,-1.27)
  round 1.397 hole 1.016: 2(-5.08,1.27) 3(-2.54,-1.27) 4(-2.54,1.27) 5(0,-1.27) 6(0,1.27) 7(2.54,-1.27) 8(2.54,1.27) 9(5.08,-1.27) 10(5.08,1.27)
INDC2-200-M
  round 2.286 hole 1.397: 1(-2.54,0) 2(2.54,0)
IS61WV3216DBLL_TSOP
  rect 2.591x0.381 smd: 1(-0.229,17.475) 2(-0.229,16.688) 3(-0.229,15.9) 4(-0.229,15.113) 5(-0.229,14.326) 6(-0.229,13.538) 7(-0.229,12.751) 8(-0.229,11.963) 9(-0.229,11.176) 10(-0.229,10.389) 11(-0.229,9.601) 12(-0.229,8.814) 13(-0.229,8.026) 14(-0.229,7.239) 15(-0.229,6.452) 16(-0.229,5.664) 17(-0.229,4.877) 18(-0.229,4.089) 19(-0.229,3.302) 20(-0.229,2.515) 21(-0.229,1.727) 22(-0.229,0.94) 23(11.989,0.94) 24(11.989,1.727) 25(11.989,2.515) 26(11.989,3.302) 27(11.989,4.089) 28(11.989,4.877) 29(11.989,5.664) 30(11.989,6.452) 31(11.989,7.239) 32(11.989,8.026) 33(11.989,8.814) 34(11.989,9.601) 35(11.989,10.389) 36(11.989,11.176) 37(11.989,11.963) 38(11.989,12.751) 39(11.989,13.538) 40(11.989,14.326) 41(11.989,15.113) 42(11.989,15.9) 43(11.989,16.688) 44(11.989,17.475)
LM26420-TSSOP
  rect 1.1x0.419 smd: 1(-0.749,6.175) 2(-0.749,5.524) 3(-0.749,4.874) 4(-0.749,4.224) 5(-0.749,3.574) 6(-0.749,2.926) 7(-0.749,2.276) 8(-0.749,1.626) 9(-0.749,0.975) 10(-0.749,0.325) 11(5.151,0.325) 12(5.151,0.975) 13(5.151,1.626) 14(5.151,2.276) 15(5.151,2.926) 16(5.151,3.574) 17(5.151,4.224) 18(5.151,4.874) 19(5.151,5.524) 20(5.151,6.175)
  rect 3x4.201 smd: 21(2.2,3.251)
LMZ10503-ADJ
  rect 0.889x3.048 smd: 1(1.27,-2.718) 2(2.54,-2.718) 3(3.81,-2.718) 4(5.08,-2.718) 5(6.35,-2.718) 6(7.62,-2.718) 7(8.89,-2.718)
  rect 5.359x8.534 smd: 8(5.08,4.572)
MJ4-SR-1
  round 1.397 hole 0.914: 1(0,0) 2(-2.489,0) 3(-2.489,-1.981) 4(0,-1.981)
  round 3.556 hole 2.54: 5(-7.264,-4.699) 6(4.775,-4.699)
MY_SOD323
  rect 0.762x0.787 smd: 1(0,0) 2(2.362,0)
OSC4-0705
  rect 1.778x2.032 smd: 1(-2.54,-2.101) 2(2.54,-2.101) 3(2.54,2.101) 4(-2.54,2.101)
PH163539A
  rect 1.626x0.686 smd: 1(-0.914,10.795) 2(-0.914,9.525) 3(-0.914,8.255) 4(-0.914,6.985) 5(-0.914,5.715) 6(-0.914,4.445) 7(-0.914,3.175) 8(-0.914,1.905) 9(7.772,1.905) 10(7.772,3.175) 11(7.772,4.445) 12(7.772,5.715) 13(7.772,6.985) 14(7.772,8.255) 15(7.772,9.525) 16(7.772,10.795)
RJ_RA-8
  round 1.27 hole 3.251 unplated: (-1.27,-6.35) (10.16,-6.35)
  rect 1.4x1.4 hole 0.899: 1(0,0)
  round 1.4 hole 0.899: 2(1.27,2.54) 3(2.54,0) 4(3.81,2.54) 5(5.08,0) 6(6.35,2.54) 7(7.62,0) 8(8.89,2.54)
SC0402
  rect 0.635x0.508 smd: 1(-0.508,0) 2(0.508,0)
SC0603
  rect 0.813x0.889 smd: 1(-0.762,0) 2(0.762,0)
SC0805
  rect 1.016x1.143 smd: 1(-1.016,0) 2(1.016,0)
SC1206
  rect 1.397x1.651 smd: 1(-1.397,0) 2(1.397,0)
SC1812
  rect 1.524x3.175 smd: 1(-2.286,0) 2(2.286,0)
SD0805
  rect 1.016x1.27 smd: 1(-1.143,0) 2(1.143,0)
SIP-3P
  rect 1.397x1.397 hole 0.914: 1(-2.54,0)
  round 1.397 hole 0.914: 2(0,0) 3(2.54,0)
SIP-4P-156
  rect 2.794x2.794 hole 1.778: 1(-5.944,0)
  round 2.794 hole 1.778: 2(-1.981,0) 3(1.981,0) 4(5.944,0)
SL1206
  rect 1.397x1.651 smd: 1(-1.397,0) 2(1.397,0)
SL1812
  rect 1.524x3.175 smd: 1(-2.286,0) 2(2.286,0)
SOP8-50-160
  rect 0.635x2.286 smd: 1(-1.905,-2.794) 2(-0.635,-2.794) 3(0.635,-2.794) 4(1.905,-2.794) 5(1.905,2.794) 6(0.635,2.794) 7(-0.635,2.794) 8(-1.905,2.794)
SOP56-25-300
  rect 0.305x1.778 smd: 1(-8.572,-4.953) 2(-7.938,-4.953) 3(-7.303,-4.953) 4(-6.668,-4.953) 5(-6.032,-4.953) 6(-5.397,-4.953) 7(-4.763,-4.953) 8(-4.128,-4.953) 9(-3.493,-4.953) 10(-2.857,-4.953) 11(-2.223,-4.953) 12(-1.587,-4.953) 13(-0.953,-4.953) 14(-0.318,-4.953) 15(0.318,-4.953) 16(0.953,-4.953) 17(1.587,-4.953) 18(2.223,-4.953) 19(2.857,-4.953) 20(3.493,-4.953) 21(4.128,-4.953) 22(4.763,-4.953) 23(5.397,-4.953) 24(6.032,-4.953) 25(6.668,-4.953) 26(7.303,-4.953) 27(7.938,-4.953) 28(8.572,-4.953) 29(8.572,4.953) 30(7.938,4.953) 31(7.303,4.953) 32(6.668,4.953) 33(6.032,4.953) 34(5.397,4.953) 35(4.763,4.953) 36(4.128,4.953) 37(3.493,4.953) 38(2.857,4.953) 39(2.223,4.953) 40(1.587,4.953) 41(0.953,4.953) 42(0.318,4.953) 43(-0.318,4.953) 44(-0.953,4.953) 45(-1.587,4.953) 46(-2.223,4.953) 47(-2.857,4.953) 48(-3.493,4.953) 49(-4.128,4.953) 50(-4.763,4.953) 51(-5.397,4.953) 52(-6.032,4.953) 53(-6.668,4.953) 54(-7.303,4.953) 55(-7.938,4.953) 56(-8.572,4.953)
SR0402
  rect 0.635x0.508 smd: 1(-0.508,0) 2(0.508,0)
SR0603
  rect 0.762x0.813 smd: 1(-0.762,0) 2(0.762,0)
STC3528
  rect 2.032x2.286 smd: 1(-1.651,0) 2(1.651,0)
STC7343
  rect 3.302x2.413 smd: 1(-3.175,0) 2(3.175,0)
SWITCH-3P-DIP
  round 1.397 hole 1.016: 1(2.007,0.991) 2(4.547,0.991) 3(7.087,0.991) 4(7.087,8.611) 5(4.547,8.611) 6(2.007,8.611)
TP_40MIL
  round 1.397 hole 1.016: 1(0,0)
TPS3307-SOIC
  rect 1.549x0.61 smd: 1(-0.787,4.369) 2(-0.787,3.099) 3(-0.787,1.829) 4(-0.787,0.559) 5(4.699,0.559) 6(4.699,1.829) 7(4.699,3.099) 8(4.699,4.369)
TPS3820-33-SOT23
  rect 0.61x1.067 smd: 1(0.498,-0.559) 2(1.448,-0.559) 3(2.398,-0.559) 4(2.398,2.159) 5(0.498,2.159)
TPS74201-KTW
  rect 0.864x3.556 smd: 1(1.245,-4.064) 2(2.515,-4.064) 3(3.785,-4.064) 4(5.055,-4.064) 5(6.325,-4.064) 6(7.595,-4.064) 7(8.865,-4.064)
  custom 10.109x7.722 smd: 8(1.245,2.718)
unnamed
  round 3.2 hole 3.2 unplated: (0,0)
XTAL2-200A
  round 1.321 hole 0.813: 1(-2.54,0) 2(2.54,0)

## Nets
GND: BT1.2 BT2.2 C1.2 C2.2 C3.2 C4.2 C5.2 C6.2 C7.1 C8.2 C9.2 C10.2 C11.2 C12.2 C13.2 C14.2 C15.2 C16.2 C17.2 C18.2 C19.2 C20.2 C21.2 C22.2 C23.2 C24.2 C25.2 C26.1 C27.2 C28.2 C29.2 C30.2 C31.2 C32.2 C33.2 C34.2 C35.2 C36.2 C37.2 C39.2 C40.2 C41.2 C42.2 C43.2 C44.2 C45.2 C46.2 C47.2 C48.2 C49.2 C50.2 C51.2 C52.2 C53.2 C54.2 C55.2 C56.2 C57.2 C58.2 C59.2 C60.2 C61.2 C62.2 C63.2 C64.2 C65.2 C66.2 C67.2 C68.2 C69.2 C70.2 C71.2 C72.2 C73.2 C74.2 C75.2 C76.2 C77.2 C78.2 C79.2 C80.2 C81.2 C82.2 C83.2 C84.2 C85.2 C86.2 C87.2 C88.2 C89.2 C90.2 C91.2 C92.2 C93.2 C94.2 C95.2 C96.2 C97.2 C98.2 C99.2 C100.2 C101.2 C102.2 C103.2 C104.2 C105.2 C106.2 C107.2 C108.2 C109.2 C110.2 C111.2 C112.2 C113.2 C115.2 C116.2 C117.2 C118.2 C119.2 C120.2 C121.2 C122.2 C123.2 C124.2 C125.2 C126.2 C127.2 C128.2 C129.2 C130.2 C131.2 C132.2 C133.2 C134.2 C135.2 C136.2 C137.2 C138.2 C139.2 C140.2 C141.2 C142.2 C143.2 C144.2 C145.2 C146.2 C147.2 C148.1 C149.2 C150.2 C151.1 C152.1 C153.2 C154.2 C155.1 C156.2 C157.2 C158.2 C159.1 C160.1 C558.2 C559.2 C560.2 C561.2 J1.2 J2.2 J3.1 J4.1 J5.1 J6.2(GND1) J6.10(GND2) J7.2(GND) J7.10(GND#10) J8.2 J8.3 J8.4 J8.5 J9.2 J9.3 J9.4 J9.5 J10.2 J10.3 J10.4 J10.5 J11.2 J11.3 J11.4 J11.5 J12.2 J12.3 J12.4 J12.5 J13.2 J13.3 J13.4 J13.5 J14.4(GND) J15.4(GND) P2.1 P2.4 R21.1 R26.2 R29.1 R32.1 R38.2 R39.2 R40.2 R44.2 R46.2 R47.2 R48.2 R51.1 R58.2 R59.2 R60.2 R62.2 R63.1 R66.1 R68.2 R71.1 R77.2 SW1.1(A1) TP1.1(TP) TP2.1(TP) TP3.1(TP) TP4.1(TP) U1.3(REFGND) U1.4(REFGND1) U1.5(IN-) U1.10(DGND) U1.17(AGND#17) U1.18(AGND#18) U1.20(REFIN) U1.21(GND(EP)) U2.7(V-) U3.6(REF) U3.7(REF) U3.8(-VS) U3.13(-VS) U4.3(REFGND) U4.4(REFGND1) U4.5(IN-) U4.10(DGND) U4.17(AGND#17) U4.18(AGND#18) U4.20(REFIN) U4.21(GND(EP)) U5.7(V-) U6.5(RXGND2) U6.6(TXGND) U6.15(GND2) U6.33(GND3) U6.41(TEST) U6.45(GND1) U6.47(RXGND1) U7.5(VSS) U8.4(GND) U9.4(GND) U10.2(GND) U11.B2(GND#B2) U11.B15(GND#B15) U11.C5(GND#C5) U11.C12(GND#C12) U11.D7(GND#D7) U11.D10(GND#D10) U11.E1(DIFFCLK_0N/CLK1) U11.E2(GND#E2) U11.E4(GND#E4) U11.E12(GNDA2) U11.E13(GND#E13) U11.E15(DIFFCLK_2P/CLK4) U11.G4(GND#G4) U11.G13(GND#G13) U11.H7(GND#H7) U11.H8(GND#H8) U11.H9(GND#H9) U11.H10(GND#H10) U11.H15(GND#H15) U11.H16(GND#H16) U11.J7(GND#J7) U11.J8(GND#J8) U11.J9(GND#J9) U11.J10(GND#J10) U11.K4(GND#K4) U11.K13(GND#K13) U11.M1(DIFFCLK_1N/CLK3) U11.M2(DIFFCLK_1P/CLK2) U11.M4(GND#M4) U11.M5(GNDA1) U11.M13(GND#M13) U11.M15(DIFFCLK_3P/CLK6) U11.N7(GND#N7) U11.N10(GND#N10) U11.P5(GND#P5) U11.P12(GND#P12) U11.R2(GND#R2) U11.R15(GND#R15) U12.4(GND) U13.4(GND) U13.8(EP) U14.4(GND) U15.6(PGND1_1) U15.7(PGND1_2) U15.10(DAP1) U15.11(DAP2) U15.14(PGND2_2) U15.15(PGND2_1) U15.20(AGND) U15.21(PAD) U16.4(GND) U16.8(PAD) U17.4(GND) U17.8(PAD) U18.12(GND#12) U18.34(GND#34) U19.12(GND#12) U19.34(GND#34) U20.4(GND1) U20.7(GND2) U20.13(AGND1) U20.17(AGND2) U20.19(GND3) U20.33(GND4) U20.35(GND5) U20.48(GND6) U21.2(GND) U22.2(A1) U22.3(A2) U22.4(VSS) U23.5(GND1) U23.13(GND2)
GND_EARTH: C38.2 C39.1 C40.1 J14.5(S1) J14.6(S2) J15.5(S1) J15.6(S2) R68.1 R77.1
VBUS_SENSE: C152.2 R71.2 R72.1 U23.14(CBUS1)
VCC1.2VD: C65.1 C66.1 C67.1 C68.1 C69.1 C70.1 C71.1 C72.1 C73.1 C74.1 C82.1 C83.1 C123.1 L3.1 R56.1 U11.D13(VCCD_PLL2) U11.G6(VCCINT#G6) U11.G7(VCCINT#G7) U11.G8(VCCINT#G8) U11.G9(VCCINT#G9) U11.G10(VCCINT#G10) U11.H6(VCCINT#H6) U11.H11(VCCINT#H11) U11.K7(VCCINT#K7) U11.N4(VCCD_PLL1)
VCC2.5VA: C13.1 C14.1 C15.1 C17.1 C31.1 C32.1 C33.1 C34.1 C62.1 C78.1 C79.1 C80.1 C81.1 C128.1 J6.4(VCCA) R22.1 R23.1 R61.1 U1.11(DVDD) U1.16(AVDD) U4.11(DVDD) U4.16(AVDD) U11.F12(VCCA2) U11.L5(VCCA1) U17.3(OUT)
VCC2.5VD: C9.1 C11.1 C27.1 C28.1 C37.1 C48.1 C49.1 C50.1 C75.1 C76.1 C77.1 C124.1 D7.1(ANODE) D8.1(ANODE) D10.1(ANODE) D11.1(ANODE) D13.1(ANODE) L4.2 R35.1 R57.2 T1.5(CT) U1.7(PDREF) U1.8(VIO) U1.14(SDI) U4.7(PDREF) U4.8(VIO) U4.14(SDI) U6.2(RXVDD25) U6.9(TXVDD25) U9.2(SENSE2) U11.K3(VCCIO2#K3) U11.M3(VCCIO2#M3)
VCC3.3VA: C2.1 C4.1 C21.1 C22.1 C112.1 C113.1 C122.1 R55.1 U2.2(V+) U5.2(V+) U14.2(VIN) U16.3(OUT)
VCC3.3VD: C41.1 C42.1 C43.1 C44.1 C45.1 C58.1 C59.1 C60.1 C61.1 C63.1 C64.1 C84.1 C85.1 C86.1 C87.1 C88.1 C89.1 C90.1 C91.1 C92.1 C93.1 C94.1 C95.1 C96.1 C97.1 C98.1 C99.1 C100.1 C101.1 C109.1 C110.1 C111.1 C114.2 C126.1 C130.1 C131.1 C132.1 C133.1 C134.1 C135.1 C136.1 C137.1 C138.1 C139.1 C140.1 C141.1 C142.1 C143.1 C144.1 C145.1 C146.1 C147.1 C149.1 C150.1 C151.2 C153.1 C154.1 C558.1 C559.1 C560.1 C561.1 D3.1(K) D4.1(K) D5.1(K) D6.1(K) J3.3 J4.3 J5.3 J7.4(VCC) LED3.1(ANODE) LED4.1(ANODE) R18.1 R19.1 R20.1 R24.1 R25.1 R49.2 R65.2 R67.2 R69.2 R70.2 R73.2 R76.2 R501.1 R502.1 R503.1 U6.23(VDD1) U6.30(VDD2) U6.42(VDD3) U7.8(VCC) U8.3(VCC_3) U8.7(VCC_7) U8.8(VCC_8) U9.1(SENSE1) U9.8(VDD) U10.4(VCC) U11.A1(VCCIO8#A1) U11.A16(VCCIO7#A16) U11.C4(VCCIO8#C4) U11.C7(VCCIO8#C7) U11.C10(VCCIO7#C10) U11.C13(VCCIO7#C13) U11.E3(VCCIO1#E3) U11.E14(VCCIO6#E14) U11.G3(VCCIO1#G3) U11.G14(VCCIO6#G14) U11.K14(VCCIO5#K14) U11.M14(VCCIO5#M14) U11.P4(VCCIO3#P4) U11.P7(VCCIO3#P7) U11.P10(VCCIO4#P10) U11.P13(VCCIO4#P13) U11.T1(VCCIO3#T1) U11.T16(VCCIO4#T16) U13.6(VOUT1) U13.7(VOUT2) U17.5(IN) U17.7(EN) U18.11(VDD#11) U18.33(VDD#33) U19.11(VDD#11) U19.33(VDD#33) U20.6(VCC1) U20.10(AVCC1) U20.14(AVCC2) U20.18(VCC2) U20.24(VCC3) U20.34(VCC4) U20.39(VCC5) U20.50(VCC6) U21.5(VDD) U22.8(VCC) U23.12(VCC)
VCC5V: C5.1 C6.1 C23.1 C24.1 C102.1 C103.1 C105.1 C106.1 L1.2 U3.5(+VS) U3.16(+VS) U12.2(VIN)
VCC_IN: C118.1 C119.1 C120.1 C121.1 C127.1 L1.1 L2.1 P2.2 P2.3 R52.1 R53.2 R54.1 U15.2(EN1) U15.3(VIND1_1) U15.4(VIND1_2) U15.17(VIND2_2) U15.18(VIND2_1) U15.19(EN2) U16.5(IN) U16.6(BIAS) U16.7(EN) U17.6(BIAS)
VCCIO: C155.2 U23.3(VCCIO) U23.10(3V3OUT) U23.11(RESET#)
A0: R73.1 SW1.6(B1) U22.1(A0)
A_A0: U11.A2(DIFFIO_T5N) U18.44(A0)
A_A1: U11.B3(DIFFIO_T2P) U18.43(A1)
A_A2: U11.A3(DIFFIO_T2N) U18.42(A2)
A_A3: U11.F2(DIFFIO_L3P) U18.27(A3)
A_A4: U11.F1(DIFFIO_L3N) U18.26(A4)
A_A5: U11.G2(DIFFIO_L4P) U18.25(A5)
A_A6: U11.G1(DIFFIO_L4N) U18.24(A6)
A_A7: U11.D4(IO_1) U18.21(A7)
A_A8: U11.C3(DIFFIO_T1N) U18.20(A8)
A_A9: U11.D5(DIFFIO_T3N) U18.19(A9)
A_A10: U11.C6(VREFB8N0) U18.18(A10)
A_A11: U11.A11(DIFFIO_T17N) U18.5(A11)
A_A12: U11.B11(DIFFIO_T17P) U18.4(A12)
A_A13: U11.A12(DIFFIO_T18N) U18.3(A13)
A_A14: U11.B12(DIFFIO_T18P) U18.2(A14)
A_B0: U11.P11(VREFB4N0) U19.44(A0)
A_B1: U11.N11(RDN2) U19.43(A1)
A_B2: U11.T10(DIFFIO_B15N) U19.42(A2)
A_B3: U11.M9(DIFFIO_B14P) U19.27(A3)
A_B4: U11.L9(DIFFIO_B13N) U19.26(A4)
A_B5: U11.K9(DIFFIO_B13P) U19.25(A5)
A_B6: U11.L8(DIFFIO_B9P) U19.24(A6)
A_B7: U11.P8(DIFFIO_B10N) U19.21(A7)
A_B8: U11.M8(DIFFIO_B9N) U19.20(A8)
A_B9: U11.N8(DIFFIO_B10P) U19.19(A9)
A_B10: U11.P6(VREFB3N0) U19.18(A10)
A_B11: U11.R4(PLL1_CLKOUTP) U19.5(A11)
A_B12: U11.T3(DIFFIO_B2N) U19.4(A12)
A_B13: U11.R3(DIFFIO_B2P) U19.3(A13)
A_B14: U11.T2(IO_8) U19.2(A14)
ASDO: C56.1 D5.2(A) J7.9(ASDO) U8.5(ASDI) U11.C1(DIFFIO_L1N/DATA1/ASDO/IO)
CE_A: U11.D9(DIFFIO_T13P) U18.6(\\C\E)
CE_B: U11.T4(PLL1_CLKOUTN) U19.6(\\C\E)
CLK_OSC: U10.3(OUT) U11.E16(DIFFCLK_2N/CLK5)
CLKOUT: U11.M16(DIFFCLK_3N/CLK7) U20.5(CLKOUT)
CMD: U6.32(CMD) U11.D15(DIFFIO_R2P)
CNV1: U1.13(CNV) U11.J1(DIFFIO_L5N)
CNV2: U4.13(CNV) U11.L2(DIFFIO_L8P)
CONF_DONE: J7.3(CONF_DONE) R25.2 U11.H14(CONF_DONE)
CRC_ERROR: D9.1(ANODE) R502.2 U11.G15(DIFFIO_R4P/CRC_ERROR)
DATA1: U1.9(SDO) U11.K1(DIFFIO_L7N)
DATA2: U4.9(SDO) U11.N2(DIFFIO_L9P)
DATA_CONF: C55.1 D4.2(A) J7.7(DATA0) U8.2(DATA) U11.H2(DATA0/IO)
DCLK: C54.1 D3.2(A) J7.1(DCLK) U8.6(DCLK) U11.H1(DCLK)
EECK: U6.20(EECK) U7.2(CLK)
EECS: U6.21(EECS) U7.1(CS)
EEDIO: R15.1 U6.19(EEDIO) U7.3(DI)
FD0: U11.L16(DIFFIO_R9N) U20.25(PB0/FD0)
FD1: U11.L15(DIFFIO_R9P) U20.26(PB1/FD1)
FD2: U11.K16(DIFFIO_R8N) U20.27(PB2/FD2)
FD3: U11.K15(DIFFIO_R8P) U20.28(PB3/FD3)
FD4: U11.N16(DIFFIO_R10N) U20.29(PB4/FD4)
FD5: U11.N15(DIFFIO_R10P) U20.30(PB5/FD5)
FD6: U11.N14(RUP3) U20.31(PB6/FD6)
FD7: U11.P16(DIFFIO_R11N) U20.32(PB7/FD7)
FD8: U11.R12(DIFFIO_B17P) U20.52(PD0/FD8)
FD9: U11.T12(DIFFIO_B17N) U20.53(PD1/FD9)
FD10: U11.R11(DIFFIO_B16P) U20.54(PD2/FD10)
FD11: U11.T11(DIFFIO_B16N) U20.55(PD3/FD11)
FD12: U11.R10(DIFFIO_B15P) U20.56(PD4/FD12)
FD13: U11.M11(DIFFIO_B22P) U20.1(PD5/FD13)
FD14: U11.N12(DIFFIO_B22N) U20.2(PD6/FD14)
FD15: U11.N13(IO_13) U20.3(PD7/FD15)
FIFOADR0: U11.R14(IO_12) U20.44(PA4/FIFOADR0)
FIFOADR1: U11.T14(DIFFIO_B20P) U20.45(PA5/FIFOADR1)
FLAGA: U11.P15(RDN3) U20.36(CTL0/*FLAGA)
FLAGB: U11.R16(DIFFIO_R11P) U20.37(CTL1/*FLAGB)
FLAGC: U11.T15(DIFFIO_B20N) U20.38(CTL2/*FLAGC)
FLAGD/SLCS#: U11.T13(DIFFIO_B19N) U20.47(PA7/*FLAGD/SLCS#)
I/O_A0: U11.A10(DIFFIO_T14N) U18.7(I/O0)
I/O_A1: U11.B9(DIFFIO_T12P) U18.8(I/O1)
I/O_A2: U11.A9(DIFFIO_T12N) U18.9(I/O2)
I/O_A3: U11.D8(IO_26) U18.10(I/O3)
I/O_A4: U11.B8(DIFFIO_T11P) U18.13(I/O4)
I/O_A5: U11.A8(DIFFIO_T11N) U18.14(I/O5)
I/O_A6: U11.A7(DIFFIO_T9N) U18.15(I/O6)
I/O_A7: U11.C8(IO_25) U18.16(I/O7)
I/O_A8: U11.B7(DIFFIO_T9P/DATA4) U18.29(I/O8)
I/O_A9: U11.D1(DIFFIO_L2N) U18.30(I/O9)
I/O_A10: U11.F3(VREFB1N0/IO) U18.31(I/O10)
I/O_A11: U11.C2(DIFFIO_L1P/IO) U18.32(I/O11)
I/O_A12: U11.A6(DIFFIO_T7N) U18.35(I/O12)
I/O_A13: U11.B1(IO_4) U18.36(I/O13)
I/O_A14: U11.B6(DIFFIO_T7P) U18.37(I/O14)
I/O_A15: U11.A5(DIFFIO_T6N/DATA7) U18.38(I/O15)
I/O_B0: U11.R5(DIFFIO_B6P) U19.7(I/O0)
I/O_B1: U11.T5(DIFFIO_B6N) U19.8(I/O1)
I/O_B2: U11.R6(DIFFIO_B7P) U19.9(I/O2)
I/O_B3: U11.T6(DIFFIO_B7N) U19.10(I/O3)
I/O_B4: U11.N3(DIFFIO_B1P) U19.13(I/O4)
I/O_B5: U11.P3(DIFFIO_B1N) U19.14(I/O5)
I/O_B6: U11.L7(IO_10) U19.15(I/O6)
I/O_B7: U11.M7(DIFFIO_B5P) U19.16(I/O7)
I/O_B8: U11.N9(DIFFIO_B14N) U19.29(I/O8)
I/O_B9: U11.K10(DIFFIO_B18P) U19.30(I/O9)
I/O_B10: U11.L10(DIFFIO_B18N) U19.31(I/O10)
I/O_B11: U11.M10(RUP2) U19.32(I/O11)
I/O_B12: U11.R7(DIFFIO_B8P) U19.35(I/O12)
I/O_B13: U11.T7(DIFFIO_B8N) U19.36(I/O13)
I/O_B14: U11.R8(DIFFIO_B11P) U19.37(I/O14)
I/O_B15: U11.T8(DIFFIO_B11N) U19.38(I/O15)
IFCLK: U11.B14(PLL2_CLKOUTP) U20.20(*IFCLK)
IN1+: J1.3 U2.8(IN+)
IN1-: J1.1 U2.1(IN-)
IN2+: J2.3 U5.8(IN+)
IN2-: J2.1 U5.1(IN-)
INIT_DONE: D12.1(ANODE) R503.2 U11.G16(DIFFIO_R4N/INIT_DONE)
INT: U6.34(INT) U11.D16(DIFFIO_R2N)
LB_A: U11.B5(DIFFIO_T5P) U18.39(\\L\B)
LB_B: U11.P9(IO_11) U19.39(\\L\B)
LED1: R27.1 U11.L3(VREFB2N0)
LED2: R28.1 U11.L4(RDN1)
LED3: R30.1 U11.P1(DIFFIO_L10N)
LED4: R31.1 U11.P2(DIFFIO_L10P)
LED5: R33.1 U11.R1(IO_7)
LEDE1: D2.2(CATHODE) U6.39(LED1)
LEDE2: D1.2(CATHODE) U6.38(LED2)
MSEL0: J5.2 U11.H13(MSEL0)
MSEL1: J4.2 U11.H12(MSEL1)
MSEL2: J3.2 U11.G12(MSEL2)
NCE: J7.6(NCE) R26.1 U11.J3(NCE)
NCONFIG: J7.5(NCONFIG) R24.2 U11.H5(NCONFIG)
NCS: U6.36(IOW#) U11.J16(DIFFIO_R7N/DEV_OE)
NRD: U6.35(IOR#) U11.L12(IO_15)
NRESET: U9.5(\\R\E\S\E\T) U11.J15(DIFFIO_R7P/DEV_CLRN)
NSC0: C57.1 D6.2(A) J7.8(NCSO) U8.1(NCS) U11.D2(DIFFIO_L2P/FLASH_NCE/NCSO/IO)
NSTATUS: R501.2 U11.F4(NSTATUS)
NWR: U6.37(CS#) U11.J13(IO_20)
OE_A: U11.B4(DIFFIO_T4P) U18.41(\\O\E)
OE_B: U11.R9(DIFFIO_B12P) U19.41(\\O\E)
PKTEND: U11.R13(DIFFIO_B19P) U20.46(PA6/*PKTEND)
PWRST#: C52.1 R18.2 U6.40(PWRST#)
RESET#: U20.49(RESET#) U21.1(\\R\E\S\E\T)
RX+: R14.1 T1.6(RD1+) U6.3(RX+)
RX-: R17.2 T1.8(RD1-) U6.4(RX-)
RXD: U11.M12(IO_14) U23.4(RXD)
RXLED: R79.1 U23.16(CBUS3)
SCK1: U1.12(SCK) U11.K2(DIFFIO_L7P)
SCK2: U4.12(SCK) U11.N1(DIFFIO_L9N)
SCL: R69.1 U20.22(SCL) U22.6(SCL)
SD0: U6.18(SD0) U11.F14(VREFB6N0)
SD1: U6.17(SD1) U11.E11(RUP4)
SD2: U6.16(SD2) U11.C14(DIFFIO_T21N)
SD3: U6.14(SD3) U11.C11(VREFB7N0)
SD4: U6.13(SD4) U11.D11(DIFFIO_T20N)
SD5: U6.12(SD5) U11.D14(DIFFIO_T21P)
SD6: U6.11(SD6) U11.C9(DIFFIO_T13N)
SD7: U6.10(SD7) U11.J14(DIFFIO_R6N)
SD8: U6.31(SD8) U11.C16(DIFFIO_R1N)
SD9: U6.29(SD9) U11.C15(DIFFIO_R1P)
SD10: U6.28(SD10) U11.B16(IO_22)
SD11: U6.27(SD11) U11.A15(DIFFIO_T15P)
SD12: U6.26(SD12) U11.E9(IO_24)
SD13: U6.25(SD13) U11.A14(PLL2_CLKOUTN)
SD14: U6.24(SD14) U11.B13(DIFFIO_T19P)
SD15: U6.22(SD15) U11.A13(DIFFIO_T19N)
SDA: R70.1 U20.23(SDA) U22.5(SDA)
SLOE: U11.P14(DIFFIO_B21P) U20.42(PA2/*SLOE)
SLRD: U11.L13(IO_18) U20.8(RDY0/*SLRD)
SLWR: U11.L14(VREFB5N0) U20.9(RDY1/*SLWR)
TCK: J6.1(TCK) R21.2 U11.H3(TCK)
TDI: J6.9(TDI) R23.2 U11.H4(TDI)
TDO: J6.3(TDO) U11.J4(TDO)
TEST_PORT1: R36.2 U11.E6(DATA6/IO)
TEST_PORT2: R37.2 U11.F8(DIFFIO_T10P/DATA3)
TEST_PORT3: R41.2 U11.K11(IO_17)
TEST_PORT4: R42.2 U11.E8(DIFFIO_T10N/DATA2)
TMS: J6.5(TMS) R22.2 U11.J5(TMS)
TRG_IN: R45.2 U11.F9(DIFFIO_T16P)
TRG_OUT: R43.2 U11.J12(DIFFIO_R6P)
TURBIO1: U1.15(TURBIO) U11.J2(DIFFIO_L5P)
TURBIO2: U4.15(TURBIO) U11.L1(DIFFIO_L8N)
TX+: R13.1 T1.1(TD1+) U6.7(TX+)
TX-: R16.2 T1.3(TD1-) U6.8(TX-)
TXD: U11.L11(DIFFIO_B21N) U23.1(TXD)
TXLED: R78.1 U23.7(CBUS2)
UB_A: U11.A4(DIFFIO_T4N) U18.40(\\U\B)
UB_B: U11.T9(DIFFIO_B12N) U19.40(\\U\B)
VCOM2.048: C1.1 C3.1 C19.1 C20.1 C115.1 U2.3(VOCM) U5.3(VOCM) U14.6(VOUT)
VREF4.096V: C8.1 C16.1 C18.1 C25.1 C35.1 C36.1 C104.1 U1.1(REF) U1.2(REF1) U1.19(BVDD) U4.1(REF) U4.2(REF1) U4.19(BVDD) U12.6(VOUT)
WAKEUP: C148.2 R63.2 R64.2 U20.51(*WAKEUP)
WE_A: U11.D6(DIFFIO_T3P) U18.17(\\W\E)
WE_B: U11.M6(IO_9) U19.17(\\W\E)
WU2: SW1.2(A2) U20.43(PA3/*WU2)
X1: C51.1 U6.44(X1) Y1.2
X2: C53.1 U6.43(X2) Y1.1
XTALIN: C160.2 U20.12(XTALIN) Y2.1
XTALOUT: C159.2 U20.11(XTALOUT) Y2.2
N02473: R66.2 U20.21(RESERVED)
N02792: J14.2(DM) U20.16(DMINUS)
N02796: J14.3(DP) U20.15(DPLUS)
N03533: BT2.1 U21.3(\\M\R)
N04690: LED1.2(CATHODE) U20.41(PA1/INT1#)
N04904: LED1.1(ANODE) R65.1
N04910: LED2.1(ANODE) R67.1
N16767569: J15.1(VBUS) R72.2
N16767643: C157.1 J15.3(DP) R75.2
N16767647: C156.1 J15.2(DM) R74.2
N16767651: R75.1 U23.8(USBDP)
N16767655: R74.1 U23.9(USBDM)
N16767909: LED3.2(CATHODE) R78.2
N16768778: C158.1 R76.1 SW1.5(B2)
N16772476: P1.7(BI_DD+/NC) P1.8(BI_DD-/NC) R10.1
N16772488: P1.4(BI_DC+/NC) P1.5(BI_DC-/NC) R11.1
N16772544: P1.6(RX-) T1.9(RX2-)
N16772560: P1.3(RX+) T1.11(RX2+)
N16772564: P1.1(TX+) T1.16(TX2+)
N16772568: P1.2(TX-) T1.14(TX2-)
N16772576: C38.1 R9.2 R10.2 R11.2
N16772580: R9.1 T1.13(CM)
N16772852: C107.1 C108.1 L2.2 U13.1(VIN) U13.2(EN)
N16772994: R12.1 U6.1(BGRES)
N16773034: R12.2 U6.48(BGGND)
N16773084: R49.1 R50.1 R51.2 U13.5(FB)
N16773128: C46.1 R13.2 R16.1
N16773198: C47.1 R14.2 R17.1
N16775260: C116.1 R52.2 U15.1(VINC)
N16777290: C7.2 R1.2 U3.4(IN+)
N16777300: C12.1 R3.2 U3.1(IN-)
N16777366: R61.2 R62.1 U17.2(FB/SNS)
N16777415: C129.1 U17.1(SS)
N16778021: R4.1 U3.3(RG_1)
N16778158: R4.2 U3.2(RG)
N16778263: R2.1 U3.15(OUT)
N16778291: C10.1 R2.2 U1.6(IN+)
N16778933: R1.1 U2.4(VOUT+)
N16778934: R3.1 U2.5(VOUT-)
N16782189: C26.2 R5.2 U3.9(IN+)
N16782191: C29.1 R7.2 U3.12(IN-)
N16782271: R8.1 U3.11(RG_1)
N16782277: R8.2 U3.10(RG)
N16782287: R6.1 U3.14(OUT)
N16782301: C30.1 R6.2 U4.6(IN+)
N16782312: R7.1 U5.5(VOUT-)
N16782314: R5.1 U5.4(VOUT+)
N16786675: R55.2 R58.1 U16.2(FB/SNS)
N16786687: C125.1 U16.1(SS)
N16805343: J10.1 R43.1 R47.1
N16805507: J8.1 R36.1 R39.1
N16805551: J9.1 R37.1 R40.1
N16805647: BT1.1 U9.7(\\M\R)
N16805649: R35.2 R38.1 U9.3(SENSE3)
N16805748: J11.1 R41.1 R44.1
N16805795: J12.1 R42.1 R46.1
N16829474: J13.1 R45.1 R48.1
N16833220: D11.2(CATHODE) R31.2
N16833242: D13.2(CATHODE) R33.2
N16833288: D10.2(CATHODE) R30.2
N16833328: D8.2(CATHODE) R28.2
N16833368: D7.2(CATHODE) R27.2
N16833558: D9.2(CATHODE) R29.2
N16833638: D12.2(CATHODE) R32.2
N167732220: D2.1(ANODE) R20.2
N167732380: D1.1(ANODE) R19.2
N167737363: R15.2 U7.4(DO)
N167749810: J14.1(VBUS) R64.1
N167750551: LED2.2(CATHODE) U20.40(PA0/INT0#)
N167753051: LED4.2(CATHODE) R79.2
N167770671: L3.2 U15.5(SW1)
N167772397: R56.2 R59.1 U15.8(FB1)
N167772398: R53.1 U15.9(PG1)
N167774201: C114.1 R50.2
N167775082: C117.1 U13.3(SS)
N1677723911: R54.2 U15.12(PG2)
N1677723912: R57.1 R60.1 U15.13(FB2)
N1677723915: L4.1 U15.16(SW2)

Pads without a net: J6 6 7 8; SW1 3 4; T1 2 4 7 10 12 15; U2 6; U5 6; U6 46; U7 6 7; U9 6; U10 1; U11 B10 D3 D12 E5 E7 E10 F5 F6 F7 F10 F11 F13 F15 F16 G5 G11 J6 J11 K5 K6 K8 K12 L6 N5 N6; U12 1 3 5 7 8; U14 1 3 5 7 8; U18 1 22 23 28; U19 1 22 23 28; U21 4; U22 7; U23 2 6 15

## Via types
v1: diameter 0.406, hole 0.203, TOP to BOTTOM, 160 vias
v2: diameter 0.457, hole 0.203, TOP to BOTTOM, 192 vias
v3: diameter 0.508, hole 0.254, TOP to BOTTOM, 139 vias
v4: diameter 0.711, hole 0.406, TOP to BOTTOM, 209 vias
v5: diameter 1.016, hole 0.61, TOP to BOTTOM, 85 vias
v6: diameter 1.524, hole 1.016, TOP to BOTTOM, 13 vias

## Routing (per net, layer and track width the routed paths; a pad name or vN(x,y) marks a point on that pad's centre or on a via; arc(x,y) is an arc through that point)
GND: length 344.7
  TOP w0.127: v4(23.32,106.5) 23.42,106.6
  TOP w0.152: U11.N10 v1(73.34,43.48) ; U11.H7 v1(70.14,47.48) ; U11.P5 v1(68.55,42.68) ; U11.M4 v1(67.75,44.28) ; U11.E15 77.34,49.89 78,49.89 78.35,49.54 v1(78.35,49.13) ; v1(79.27,44.29) 77.34,44.29 U11.M15 ; U11.J10 v1(73.34,46.68) ; U11.H15 v1(77.34,48.28) ; U11.H16 v1(77.35,47.48) ; U11.J8 v1(70.94,46.68) ; U11.E13 v1(75.74,50.68) ; U11.H10 v1(72.54,47.48) ; U11.N7 v1(70.14,43.48) ; U11.G13 v1(75.74,49.08) ; U11.K13 v1(75.74,45.88) ; U11.R2 v1(66.15,41.88) ; U11.B15 v1(77.34,53.08) ; U11.D10 v1(73.34,51.48) ; U11.M5 v1(68.55,44.28) ; U11.G4 v1(67.75,49.08) ; U11.K4 v1(67.75,45.88) ; U11.J7 v1(70.14,46.68) ; U11.H9 v1(71.74,48.28) ; U11.H8 v1(71.74,47.48) ; U11.R15 v1(77.34,41.88) ; U11.E4 v1(67.75,50.68) ; U11.P12 v1(74.94,42.68) ; U11.E12 v1(74.94,50.68) ; U11.J9 v1(72.54,46.68) ; U11.C12 v1(74.94,52.28) ; U11.D7 v1(70.14,51.48) ; U11.C5 v1(68.55,52.28) ; U11.M13 v1(75.74,44.28) ; U11.E2 v1(66.15,50.68) ; U11.B2 v1(66.15,53.08)
  TOP w0.203: v1(64.19,44.3) 64.57,44.68 U11.M1 U11.M2 ; v1(66.15,50.68) 66.14,50.68 U11.E1 ; C157.2 v2(101.5,8.41)
  TOP w0.229: U4.10 46.77,34.31 v2(46.76,34.32) ; U1.17 v2(45.69,54.01) ; U4.20 v2(44.77,37.25) ; 42.6,52.08 43.76,52.08 v2(43.76,52.07) ; U4.5 v3(44.42,34.79) ; v2(46.2,51.36) 46.2,51.28 46.19,51.27 U1.10 ; U1.18 v2(45.19,54) ; v2(44.42,35.28) 44.42,35.29 U4.4 ; U4.17 v2(46.27,37.22) ; U4.3 v2(44.42,35.79) ; 42.6,52.58 v2(43.76,52.58) ; U4.18 v2(45.77,37.21) ; U1.20 v2(44.19,54.01) ; 42.6,51.58 v3(43.81,51.58)
  TOP w0.254: U6.5 109.32,74.7 v3(109.09,74.47) 108.81,74.75 U6.6 ; C156.2 v3(101.49,12.71) ; U6.15 v3(105.23,72.82) ; C47.2 v3(111.76,82.35) ; U6.47 v2(111.91,73.33) ; U6.41 v3(114.45,70.28) ; U6.45 v2(111.91,72.31) ; U6.33 v3(109.83,65.86)
  TOP w0.305: v3(29.54,44.68) 29.53,44.67 U3.8 ; U20.17 v3(102.78,37.07) ; U3.6 29.48,45.97 29.49,45.97 v3(29.54,45.97) ; U20.13 v3(102.72,34.53) ; U20.33 v3(90.27,41.52) ; U3.13 v2(31.76,44.67) ; U20.19 v3(102.72,38.34) ; U20.48 v3(92.77,31.99) ; U20.35 v3(90.22,40.25) ; v3(29.54,45.31) 29.54,45.32 U3.7 ; U20.4 v3(100.09,28.82) ; U20.7 v3(102.98,30.72)
  TOP w0.33: U19.34 v3(72.97,26.44) ; U2.7 17.4,63.06 17.4,63.07 v3(17.4,63.12) ; U18.12 v3(78.56,69.27) ; U18.34 v3(66.32,68.48) ; U19.12 v3(64.01,25.65) ; U5.7 v3(17.25,36.63)
  TOP w0.356: U23.5 v3(97.28,8.76) ; U23.13 v3(96.65,12.5)
  TOP w0.406: 87.87,24.59 v4(87.87,25.49) ; 12.78,43.89 v4(14.69,43.89) ; v3(72.14,87.93) 72.14,87.93 U15.20 ; U9.4 v4(88.51,79.08) ; U15.11 v4(71.77,82.08) ; R51.1 v4(51.31,94.67) ; U15.6 v3(68.12,84.68) ; C125.2 v4(20.45,90.4) ; R58.2 v4(21.84,90.4) ; U15.14 v2(72.09,84.03) ; C129.2 v4(79.27,91.67) ; R62.2 v4(80.67,91.67) ; U8.4 v4(56.15,80.07) ; U7.5 v4(96.09,72.82) ; U12.4 v4(33.82,60.48) ; U15.10 v3(68.2,82.08) ; U15.15 v2(72.09,84.68) ; U15.7 v3(68.12,84.03)
  TOP w0.61: C123.2 60.26,85.31 v5(60.25,85.29) ; C32.2 v5(50.06,44.07) ; C14.2 v5(49.45,56.44) ; C124.2 v5(79.92,85.33)
  TOP w0.838: U17.4 v5(83.16,94.36) ; U13.4 v5(50.01,101.32) ; U16.4 v5(24.33,93.17)
  TOP w1.016: v6(91.38,54.48) 91.26,54.48 91.25,54.48 U10.2
  BOTTOM w0.127: R48.2 v2(63.02,1.8)
  BOTTOM w0.152: C39.2 v3(119.65,101.56) ; R40.2 v2(26.97,1.78) ; C148.1 v2(114.93,42.06) ; C40.2 v3(119.63,100.15) ; R77.2 v2(117.37,15.6) ; C152.1 v2(110.3,18.71) ; R68.2 v2(117.25,38.86) ; R39.2 v2(14.3,1.73) ; R63.1 v2(110.16,42.06) ; R47.2 v2(75.06,1.78) ; R46.2 v2(51.26,1.83) ; R44.2 v2(39.4,1.93) ; R71.1 v2(115.11,18.69)
  BOTTOM w0.203: v1(66.15,53.08) 66.16,53.07 66.16,52.06 ; C93.2 68.88,42.35 v1(68.55,42.68) 69.3,43.43 C73.2 ; v1(79.86,39.4) 79.81,39.44 79.81,39.45 79.43,39.84 ; v1(70.14,46.68) 69.75,46.29 69.75,46.26 ; C96.2 v1(79.27,44.29) ; C70.2 72.27,48.28 v1(71.74,48.28) ; C74.2 73.34,47.48 v1(72.54,47.48) ; 68.19,50.24 68.19,50.24 v1(67.75,50.68) ; v1(72.54,46.68) 71.96,46.68 C72.2 71.74,46.9 v1(71.74,47.48) ; C51.2 v2(115.42,82.58) ; C101.2 v2(75.8,55.13) ; v1(74.94,50.68) 74.94,50.59 C79.2 ; v1(70.94,46.68) 70.94,47.48 C69.2 ; C71.2 69.39,47.18 69.84,47.18 v1(70.14,47.48) ; C94.2 74.54,42.29 v1(74.94,42.68) ; v1(66.04,54.18) 66.18,54.04 66.18,54.03 66.56,53.64 ; C67.2 74.15,51.49 v1(74.94,52.28) ; v1(79.88,55.65) 79.79,55.55 79.79,55.55 C91.2 ; C88.2 v1(65.34,38.44) ; C53.2 v2(120.5,82.58) ; C100.2 v1(73.33,54.86) ; C95.2 v1(75.74,40.16) ; C76.2 v1(64.26,45.87) ; C560.2 v1(70.94,54.08) ; v1(70.14,51.48) 70.14,50.79 C82.2 ; C97.2 77.35,46.88 v1(77.35,47.48) ; C77.2 v1(64.19,44.3) ; C90.2 v1(65.33,54.96) ; v1(73.34,46.68) 74.27,46.68 C68.2 ; v1(66.15,50.68) 65.73,50.26 C559.2 ; C92.2 v1(67.74,40.26)
  BOTTOM w0.229: v2(43.66,37.44) 43.74,37.52 C35.2 ; C17.2 v2(47.78,54.1) ; C18.2 v2(43.15,54.28) ; C13.2 v2(48.64,55.18) ; C31.2 49.21,38.39 v2(49.23,38.38)
  BOTTOM w0.254: C10.2 v3(40.98,49.19) ; C29.2 v3(32.54,39.47) ; R26.2 v3(40.31,90.12) ; C34.2 v3(46.88,36.31) ; C43.2 v3(108.52,70.78) ; C151.1 v3(117.42,51.94) ; C2.2 v3(15.88,56.34) ; C54.2 v3(30.94,82.04) ; 78.17,49.91 78.17,49.32 v1(78.35,49.13) 77.9,48.67 ; C160.1 v3(113.13,31.37) ; C57.2 v3(45.33,87.67) ; C9.2 v3(47.69,49.75) ; C42.2 v3(109.83,67.79) ; C140.2 v2(97.13,31.7) ; C159.1 v3(106.2,31.34) ; C22.2 v3(15.72,29.82) ; C56.2 v3(49.38,83.57) ; C12.2 v3(32.54,51.92) ; C55.2 v3(42.86,79.49) ; C48.2 v3(104.81,75.4) ; C41.2 v3(105.32,70.27) ; C30.2 v3(41.62,30.59) ; C1.2 v3(20.54,56.78) ; C49.2 v3(108.38,73.46) ; C46.2 v3(106.36,82.36) ; R21.1 v3(38.61,66.45) ; C27.2 v3(48.21,32.93) ; C153.2 v3(99.77,13.94) ; C20.2 v3(20.38,30.31) ; C155.1 v3(95.77,11.16) ; C7.1 v3(28.63,51.92) ; C26.1 v3(28.58,39.47)
  BOTTOM w0.305: C145.2 v3(95.73,41.88) ; C142.2 v3(97.31,38.53) ; C141.2 v3(96.19,35.15) ; C6.2 v3(26.42,45.09) ; v3(95.68,31.78) C138.2 ; C139.2 v3(97.31,29.24) ; v3(34.24,48.13) 34.23,48.15 C24.2 ; C143.2 v3(97.31,40.68) ; C144.2 v3(95.68,38.53) ; R66.1 v3(95.94,39.6)
  BOTTOM w0.33: C131.2 v3(66.6,69.27) ; C130.2 v3(78.79,68.48)
  BOTTOM w0.356: C102.2 v4(32.77,65.61) ; C134.2 v3(57.35,26.44) ; C115.2 v4(17.07,48.79) ; C135.2 v3(79.83,25.65) ; C104.2 v4(36.22,65.41) ; C113.2 v4(13.64,49.02)
  BOTTOM w0.406: C118.2 v4(26.87,100.43) ; v4(55.14,89.23) 55.13,89.22 C61.2 ; C62.2 v4(42.8,73.66) ; R32.1 v4(116.61,59.69) ; R59.2 v5(62.53,83.39) ; v4(68.12,89.99) 68.15,89.97 C116.2 ; R60.2 v3(77.39,83.39) ; C45.2 v4(97.03,71.6) ; R38.2 v4(83.79,80.39) ; C117.2 v3(48.74,103.94) ; v4(50.8,87.88) 50.81,87.87 C60.2 ; C149.2 v4(87.3,20.8) ; C58.2 v4(35.19,87.67) ; C37.2 v4(103.28,90.35) ; C59.2 v4(56.41,83.44) ; R29.1 v4(116.61,64.57)
  BOTTOM w0.61: C15.2 v5(54.66,49.3) ; C16.2 v5(39.4,58.62) ; v5(56.18,42.37) 56.46,42.09 56.53,42.09 57.55,41.07 ; C33.2 v5(58.12,34.8) ; C147.2 v5(97.24,23.81) ; C132.2 v5(66.87,75.12) ; C36.2 v5(41.96,44.12) ; C23.2 v5(34.14,43.33) ; C75.2 v5(50.95,46.58) ; C63.2 v5(93.5,52.53) ; C103.2 v5(30.33,57.71) ; C105.2 v5(30.76,71.81) ; C4.2 v5(20.7,54.64) ; C137.2 80.66,26.01 v5(80.65,26) ; C86.2 v5(88.77,31.55) ; C80.2 v5(88.74,47.9) ; C64.2 v5(93.62,48.11) ; v5(58.62,45.06) 60,43.68 C84.2 ; C154.2 v5(102.58,17.16) ; C158.2 v5(108.43,57.02) ; C19.2 v5(21.21,35.48) ; C150.2 v5(83.53,18.61) ; 79.26,33.3 79.26,33.28 v5(77.98,32) ; C133.2 v5(79.31,63.77) ; C121.2 v5(30.45,103.48) ; C85.2 v5(89.17,40.95) ; v5(57.68,48.84) 59.12,50.28 C65.2 ; C5.2 v5(26.59,43.31) ; C25.2 v5(36.2,34.26) ; C136.2 v5(57.61,32.32) ; C119.2 v5(62.85,90.08) ; C66.2 v5(56.15,57.92) ; C8.2 v5(35.81,51.71) ; C28.2 v5(51.08,29.85) ; C3.2 v5(21.34,62) ; C120.2 v5(73.83,90.08) ; C21.2 v5(20.55,28.14) ; C146.2 v5(99.99,45.2) ; C112.2 v5(8.92,43.13) ; C11.2 v5(48.49,44.45) ; C52.2 v5(121.22,73.72)
  BOTTOM w0.838: C110.2 v5(53.2,102.81) ; C128.2 v5(76.58,96.77) ; v5(54.52,102.93) C111.2 v6(59.47,102.93) ; C107.2 v5(46,104.47) ; C108.2 v5(46.77,102.58) ; C122.2 v5(17.7,95.45) ; C127.2 v5(88.44,95.66) ; v5(53.24,91.21) 53.21,91.24 C109.2 ; C126.2 v5(85.73,102.49)
  BOTTOM w1.016: C44.2 v6(119.1,85.29) ; C50.2 v6(88.62,87.83) ; C106.2 v6(28.32,75.74)
  vias: v1(79.6,47.88) v2(44.75,53.01) v2(44.75,52.15) v2(45.21,36.35) v2(45.21,35.23) v2(45.64,52.12) v2(45.69,53.09) v2(46.25,36.3) v2(46.3,35.28) v2(69.14,86.69) v2(69.14,85.67) v2(69.14,84.4) v2(69.14,83.39) v2(70.15,84.91) v2(71.17,86.69) v2(71.17,85.67) v2(71.17,84.4) v2(71.17,83.39) v4(2.51,77.98) v4(4.29,13.56) v4(4.47,20.12) v4(4.78,85.42) v4(5.13,71.76) v4(7.04,99.8) v4(7.04,91.14) v4(7.9,80.92) v4(9.96,86.82) v4(10.67,94.44) v4(10.67,74.02) v4(14.12,99.29) v4(14.17,23.14) v4(15.34,69.67) v4(16.48,40.28) v4(18.08,110.06) v4(18.08,107.52) v4(18.08,104.98) v4(18.08,102.44) v4(19.86,38.1) v4(19.86,14.76) v4(21.39,109.04) v4(21.64,106.5) v4(21.64,104.47) v4(21.64,102.69) v4(23.16,102.69) v4(23.32,109.04) v4(23.32,104.47) v4(23.93,15.37) v4(24.21,86.06) v4(25.15,40.13) v4(25.17,78.71) v4(25.3,109.04) v4(25.3,106.5) v4(25.3,104.47) v4(25.45,102.69) v4(25.88,38.05) v4(26.52,16.92) v4(26.97,109.04) v4(26.97,106.5) v4(27.23,104.47) v4(27.23,102.69) v4(27.33,81.38) v4(27.58,89.43) v4(27.69,24.28) v4(28.42,27.86) v4(28.7,32.64) v4(30.53,110.06) v4(30.53,107.52) v4(30.53,104.98) v4(33.1,75.62) v4(33.32,77.9) v4(33.71,16.66) v4(33.91,109.17) v4(35.71,101.37) v4(35.81,105.69) v4(36.14,96.77) v4(36.65,25.27) v4(36.65,15.11) v4(37.72,99.64) v4(37.82,18.36) v4(37.87,106.65) v4(39.09,109.5) v4(40.82,20.29) v4(43.23,15.01) v4(43.99,111.07) v4(43.99,108.03) v4(45.77,111.07) v4(45.77,108.03) v4(45.92,18.57) v4(47.29,14.94) v4(47.55,111.07) v4(48.31,109.8) v4(48.31,108.03) v4(48.31,106.25) v4(48.28,104.51) v4(50.01,106.22) v4(50.09,109.8) v4(50.09,108.03) v4(50.09,104.47) v4(51.1,111.07) v4(51.87,109.8) v4(51.87,108.03) v4(51.87,106.25) v4(51.87,104.47) v4(54.66,111.07) v4(54.66,108.28) v4(54.66,105.23) v4(54.97,17.81) v4(56.44,111.07) v4(56.44,108.28) v4(56.44,105.23) v4(57.71,14.33) v4(58.88,92.96) v4(62.69,97.56) v4(63.02,110.21) v4(64.06,102.24) v4(67.36,108.48) v4(68.73,100.33) v4(71.5,104.5) v4(72.36,109.5) v4(76.5,110.06) v4(76.5,107.52) v4(76.5,105.23) v4(77.88,79.32) v4(80.31,110.31) v4(80.31,107.77) v4(80.31,105.74) v4(80.31,104.22) v4(82.35,110.31) v4(82.35,107.77) v4(82.35,105.74) v4(82.35,104.22) v4(84.38,110.31) v4(84.38,107.77) v4(84.38,105.74) v4(84.38,104.22) v4(84.48,87.6) v4(85.7,2.44) v4(86.16,110.31) v4(86.16,107.77) v4(86.16,105.74) v4(86.16,104.22) v4(88.57,6.12) v4(88.9,83.46) v4(89.46,110.06) v4(89.46,107.52) v4(89.46,105.23) v4(90.6,92.84) v4(91.67,19.91) v4(93.01,3.68) v4(93.07,97.31) v4(93.24,17.93) v4(94.11,102.31) v4(94.26,109.42) v4(95.53,98.53) v4(97.21,106.65) v4(97.61,92.81) v4(99.54,82.63) v4(99.64,98.53) v4(101.7,24.77) v4(103.84,78.92) v4(106.6,4.09) v4(108.03,22.61) v4(108.69,1.57) v4(109.07,24.16) v4(113.36,1.96) v4(114.6,6.2) v4(118.21,1.47) v4(119.02,25.45) v4(119.63,29.62) v4(122.58,48.92) v4(122.76,67.36) v4(122.83,58.09) v4(123.37,52.98) v4(124.66,29.79) v4(124.82,24.77)
